# Altium PCB F4SDR2.PcbDoc (part 1 of 3)
Units mil, origin at the board's own origin, x right, y up, seen from the top; angles counter-clockwise.
Board outline 1676.41 x 2432 mil, 6 copper layers (Top Layer, GND1, PWR, PWR2/GND2, Signal Layer 1, Bottom Layer), stack 46.185 mil thick; 213 components, 239 nets, 1245 pads, 805 vias.
Unrouted connection lines stored in the file: 91.
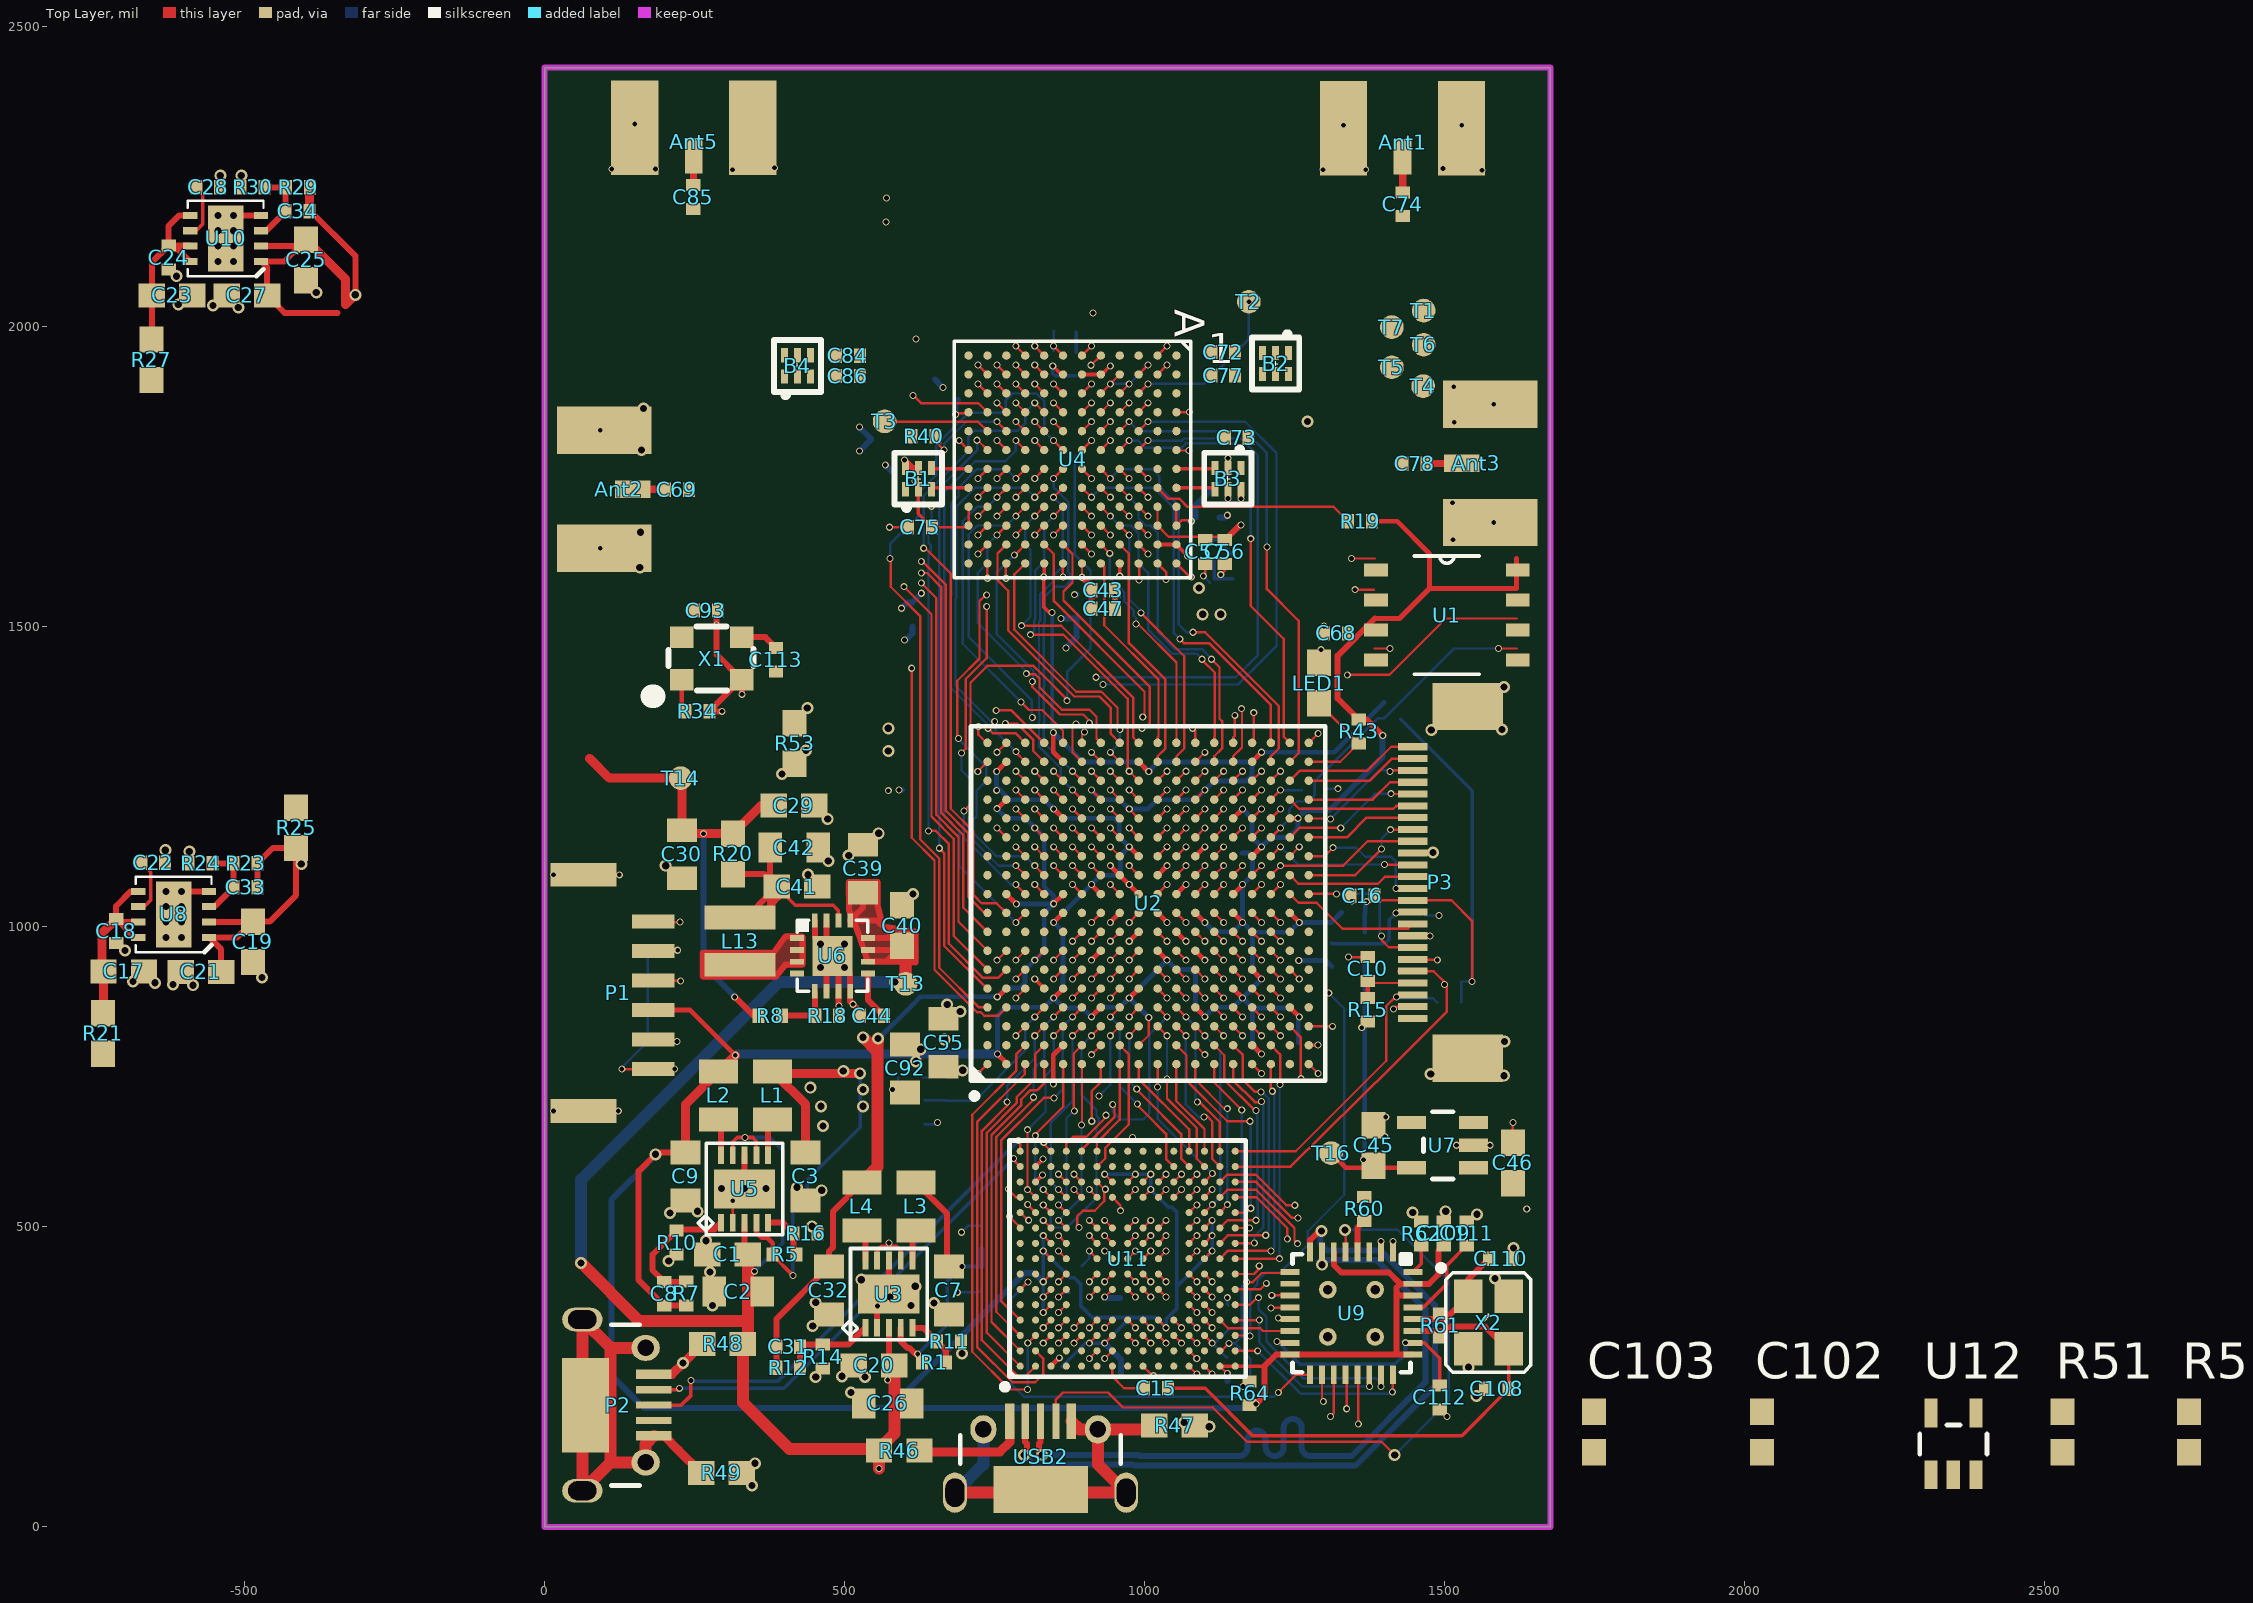
[diagram p0: Top Layer view]
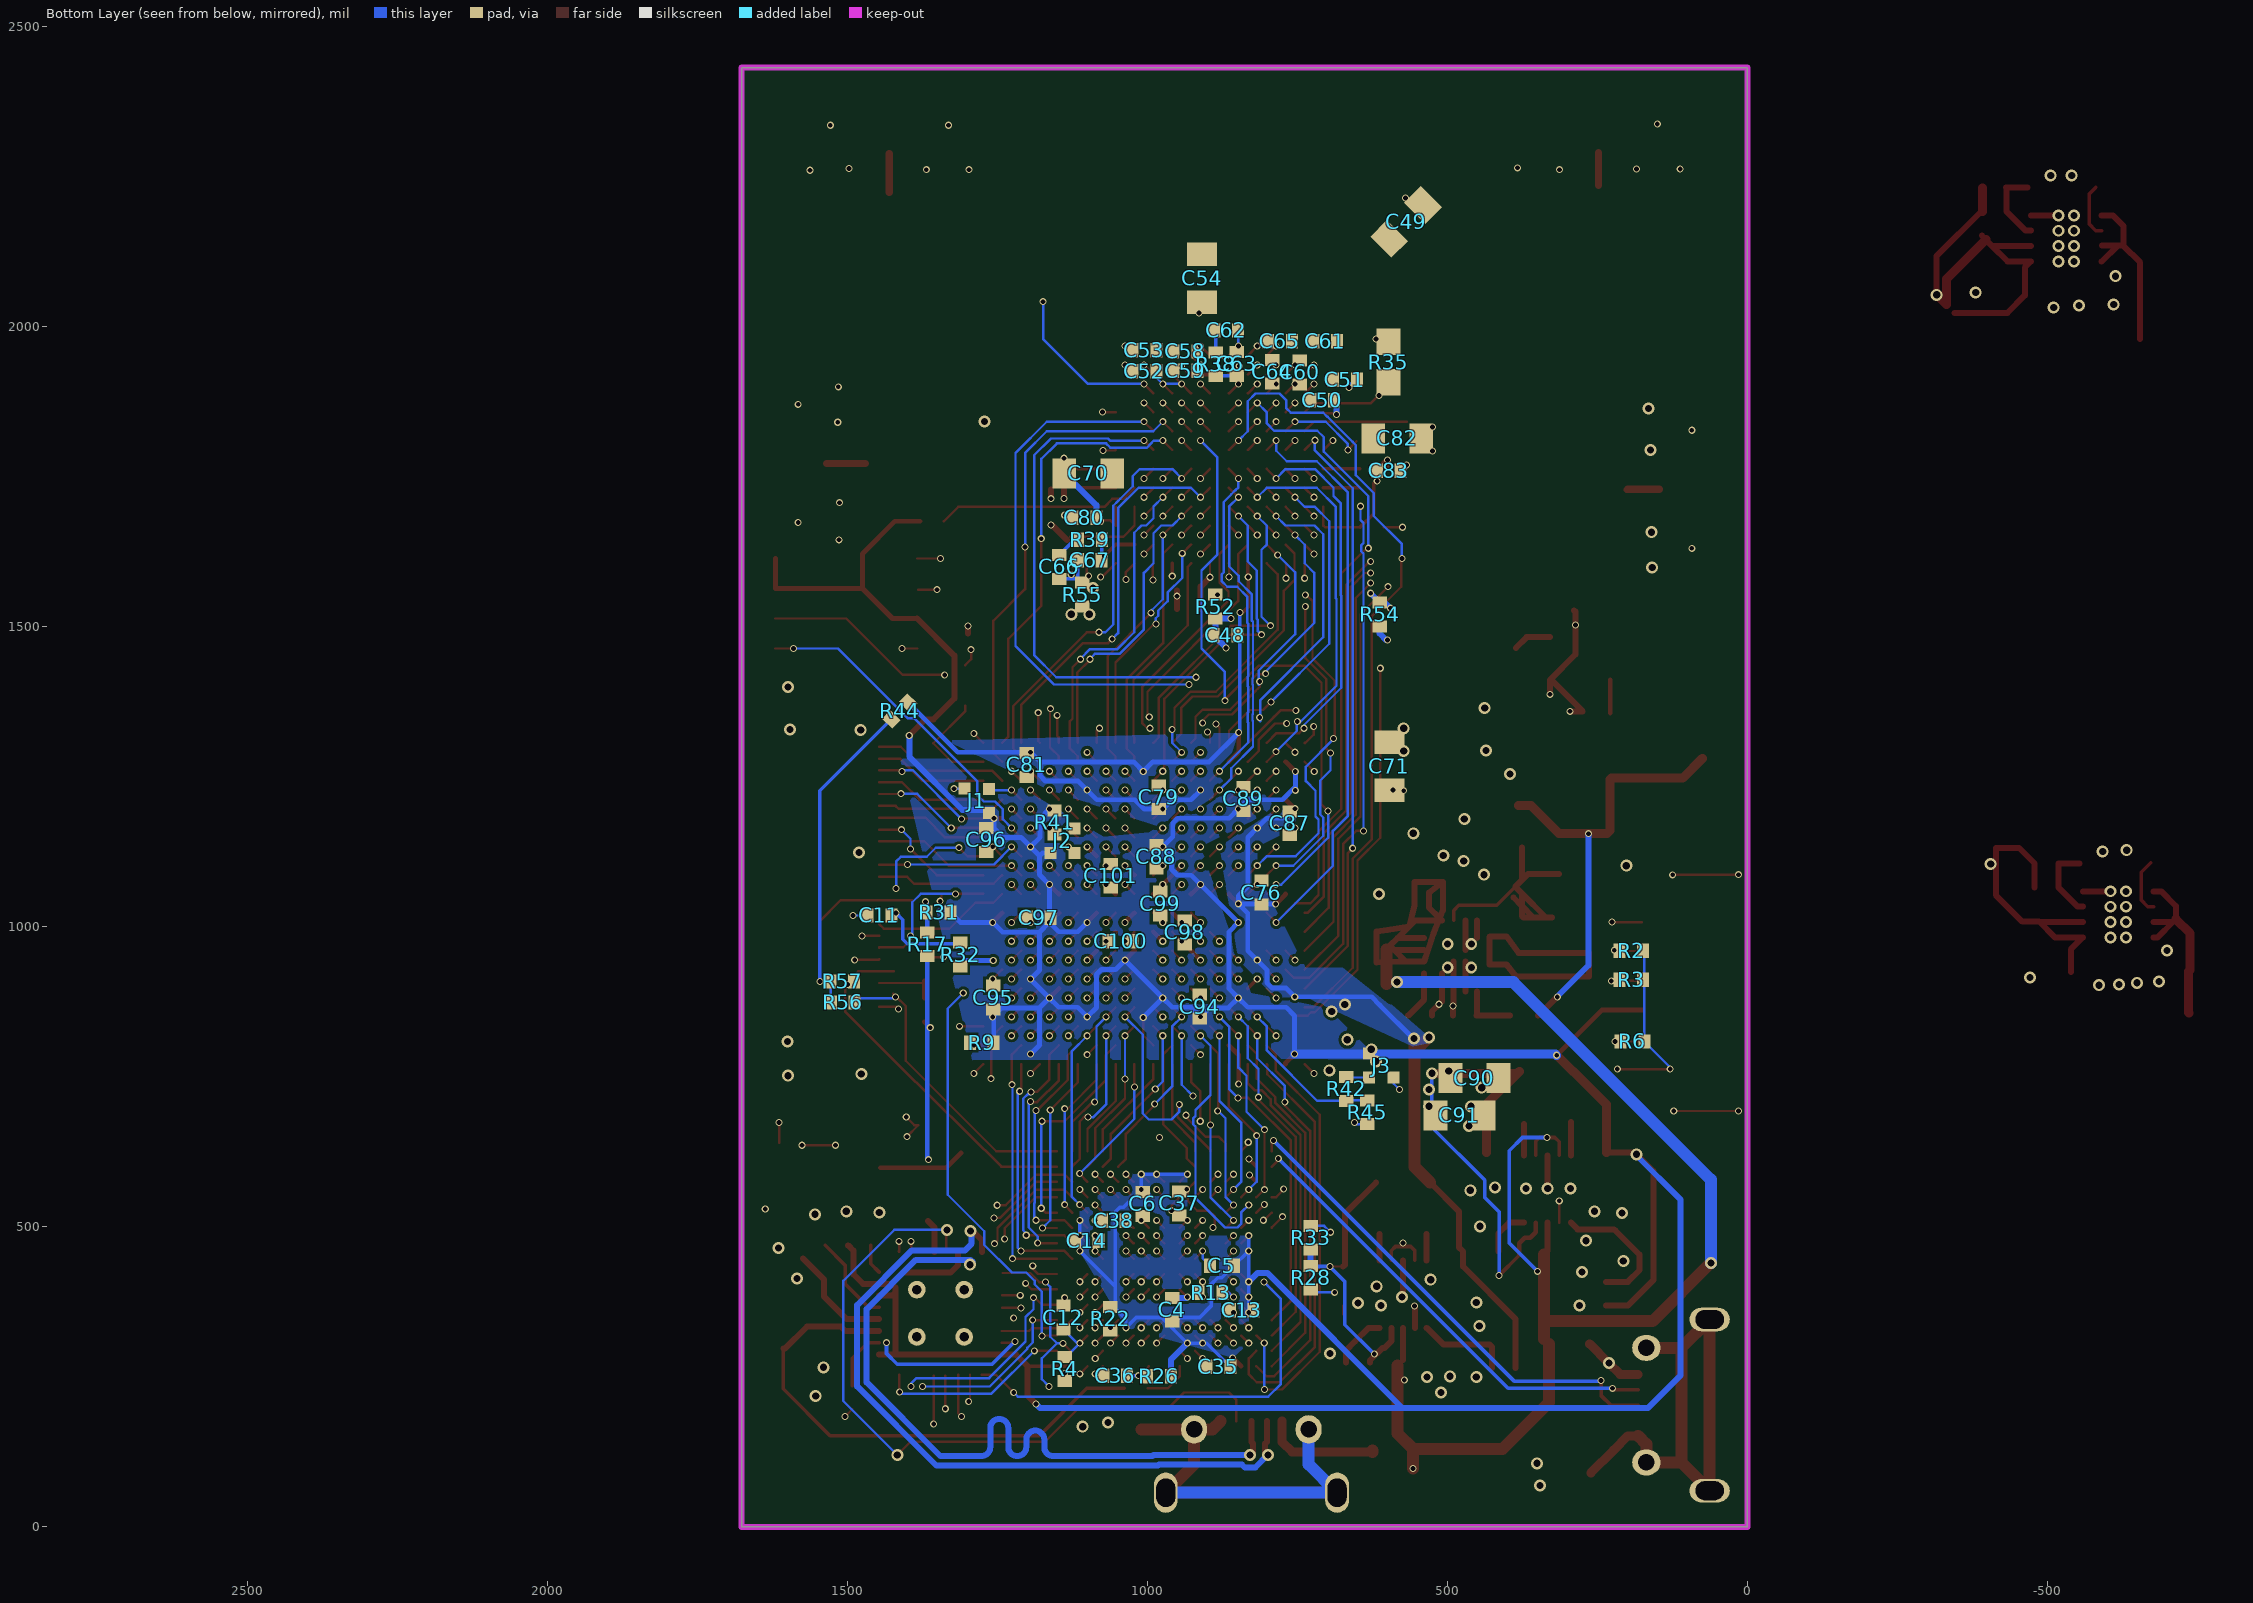
[diagram p1: Bottom Layer view, seen from below]
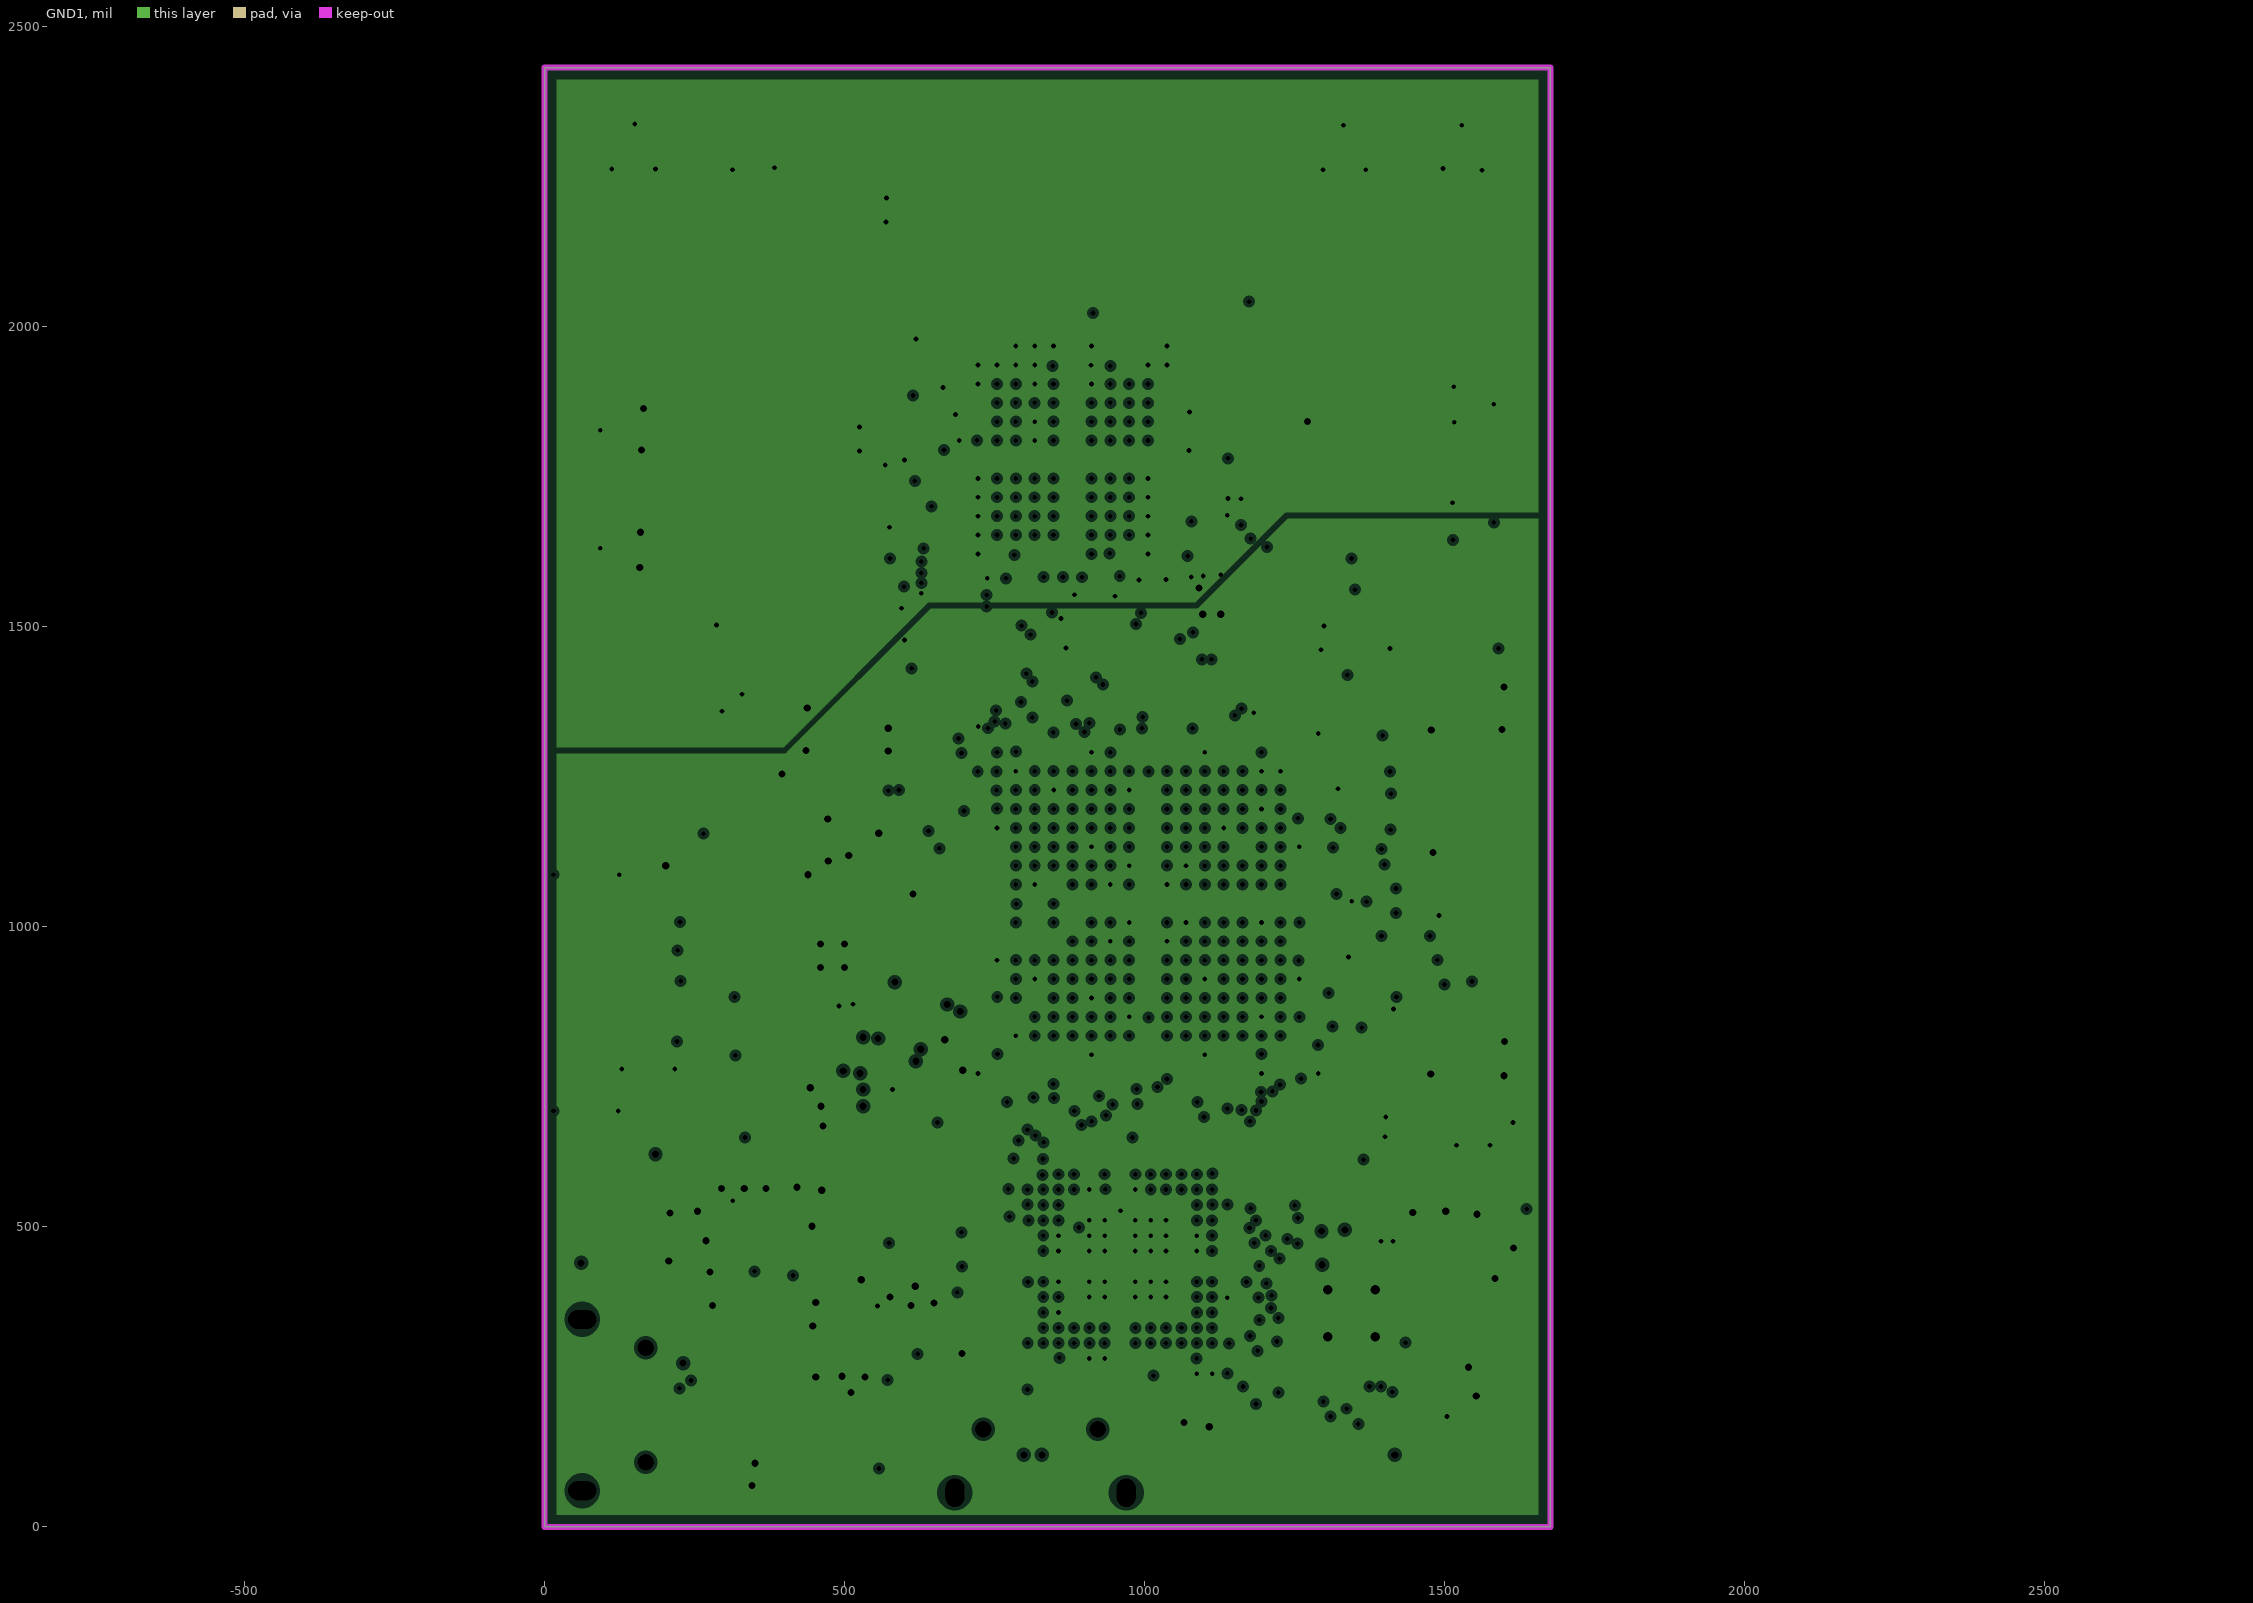
[diagram p2: GND1, clearances drawn from the general rule]
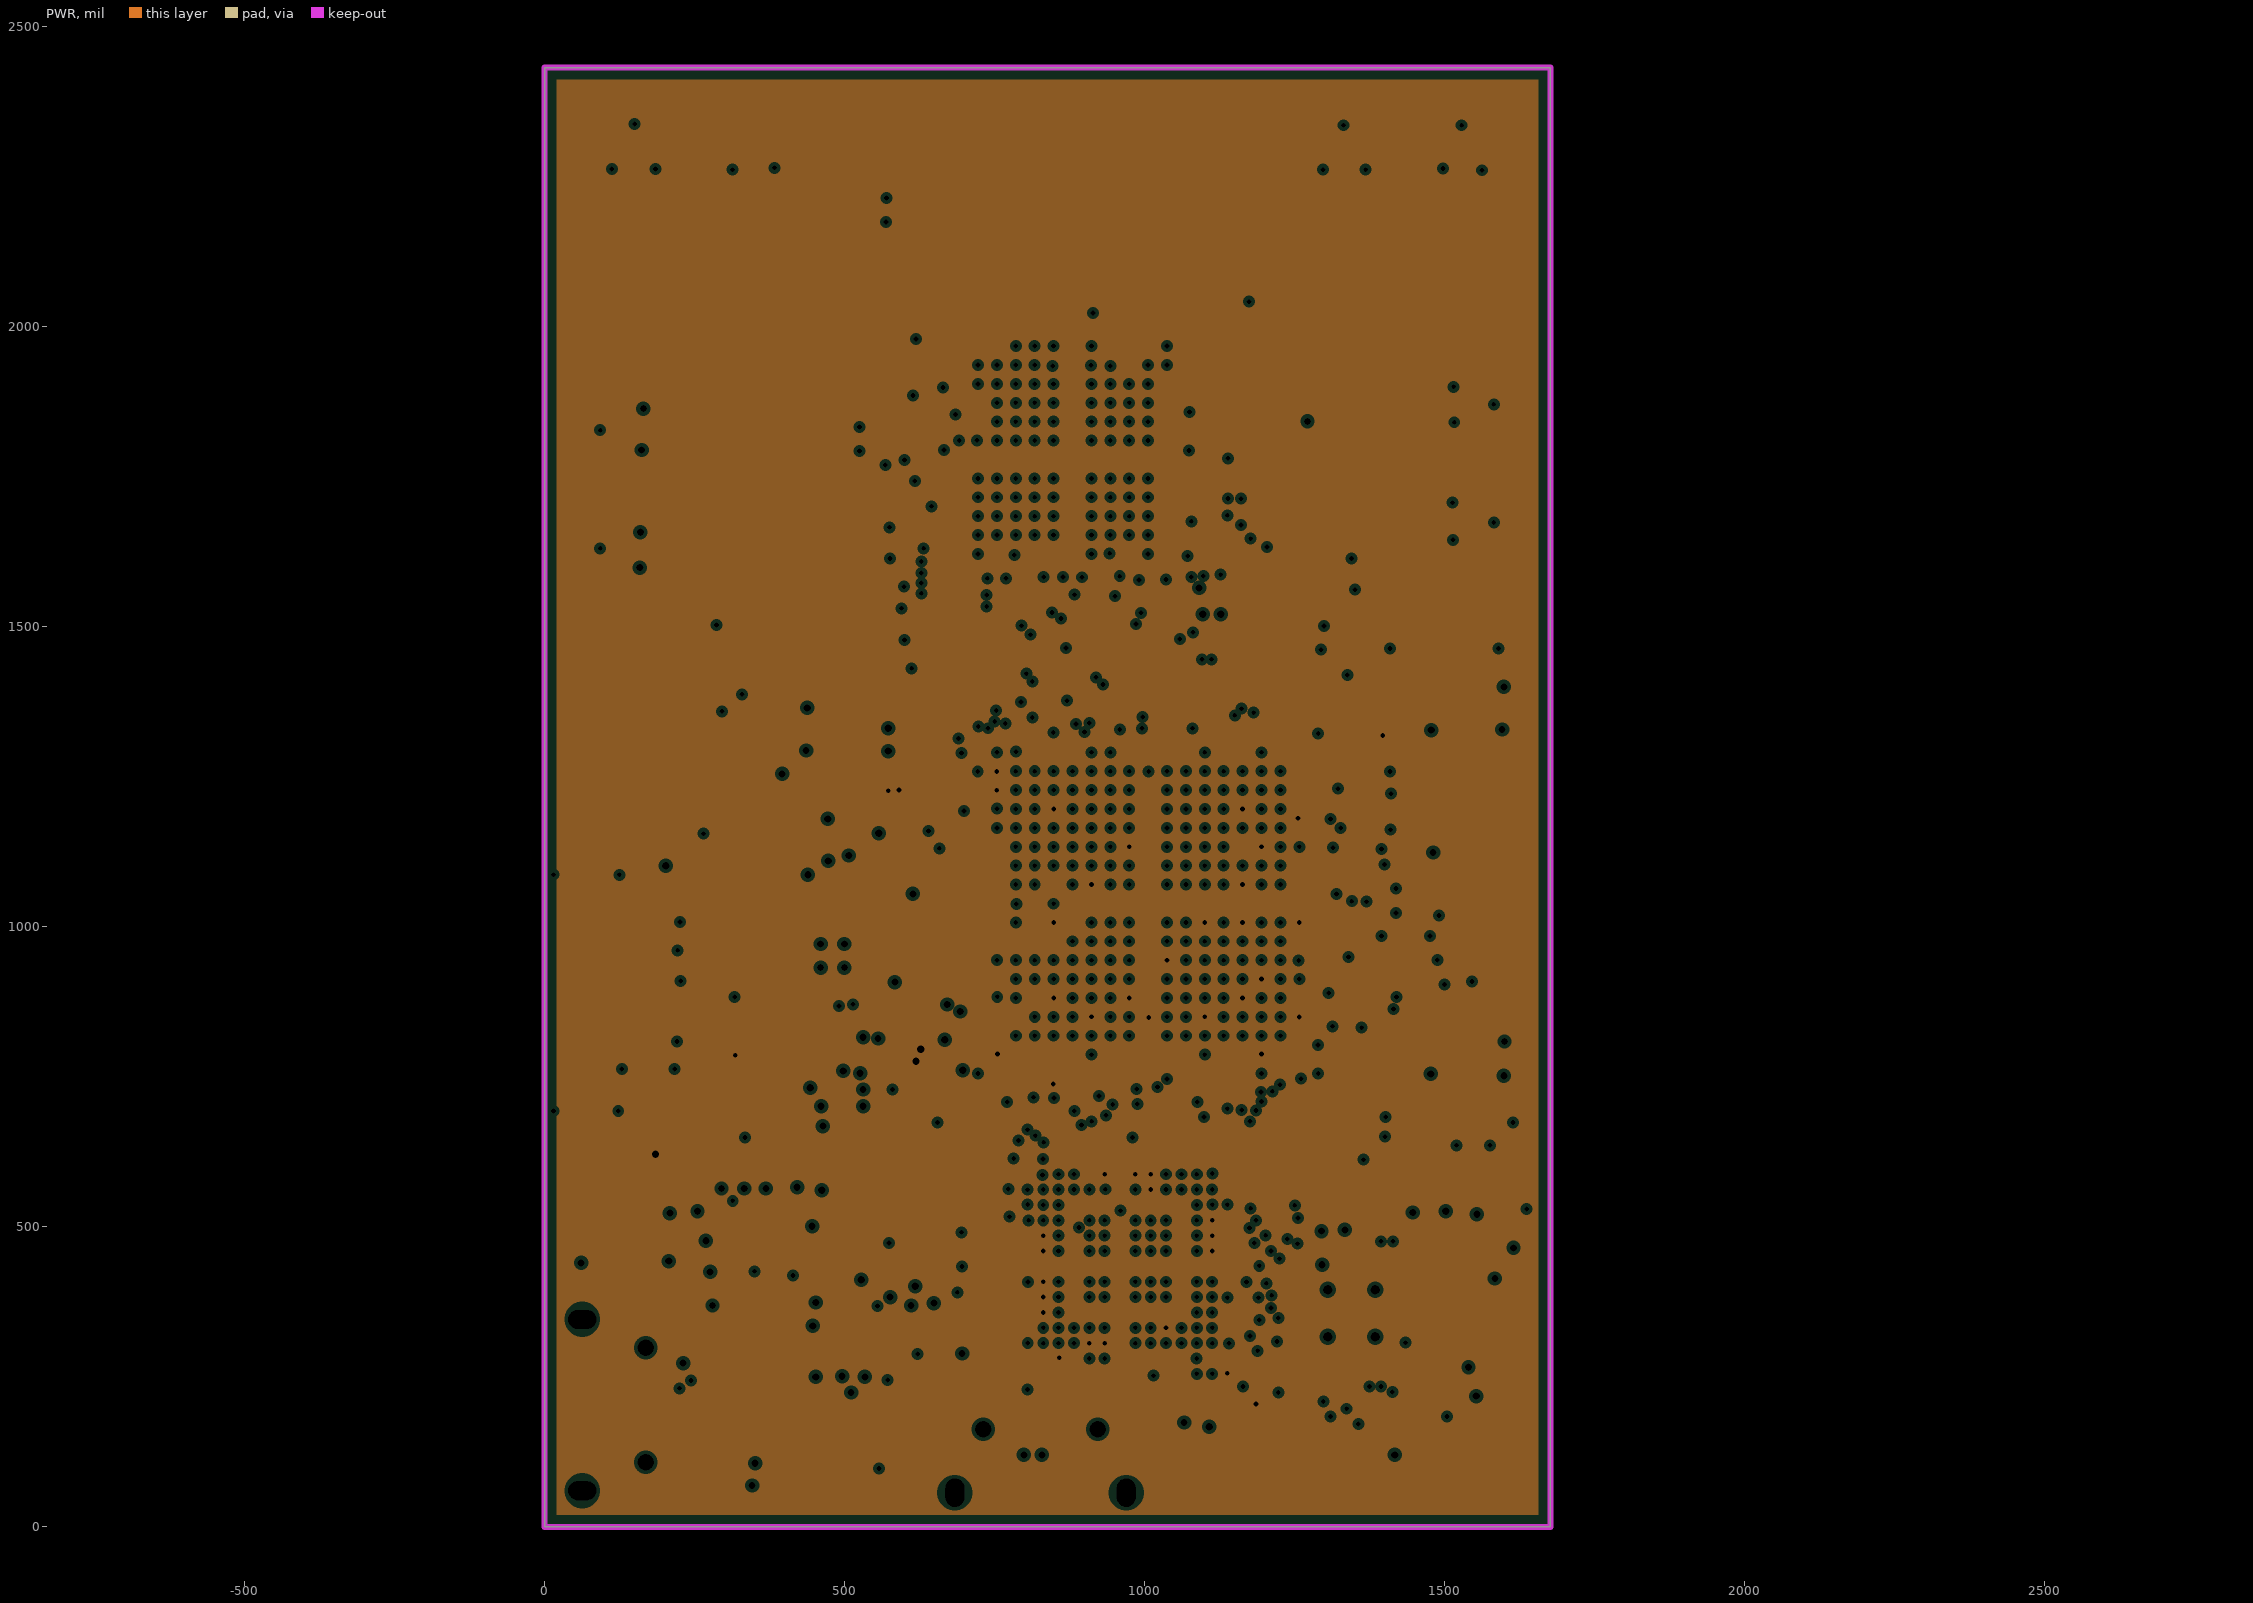
[diagram p3: PWR, clearances drawn from the general rule]
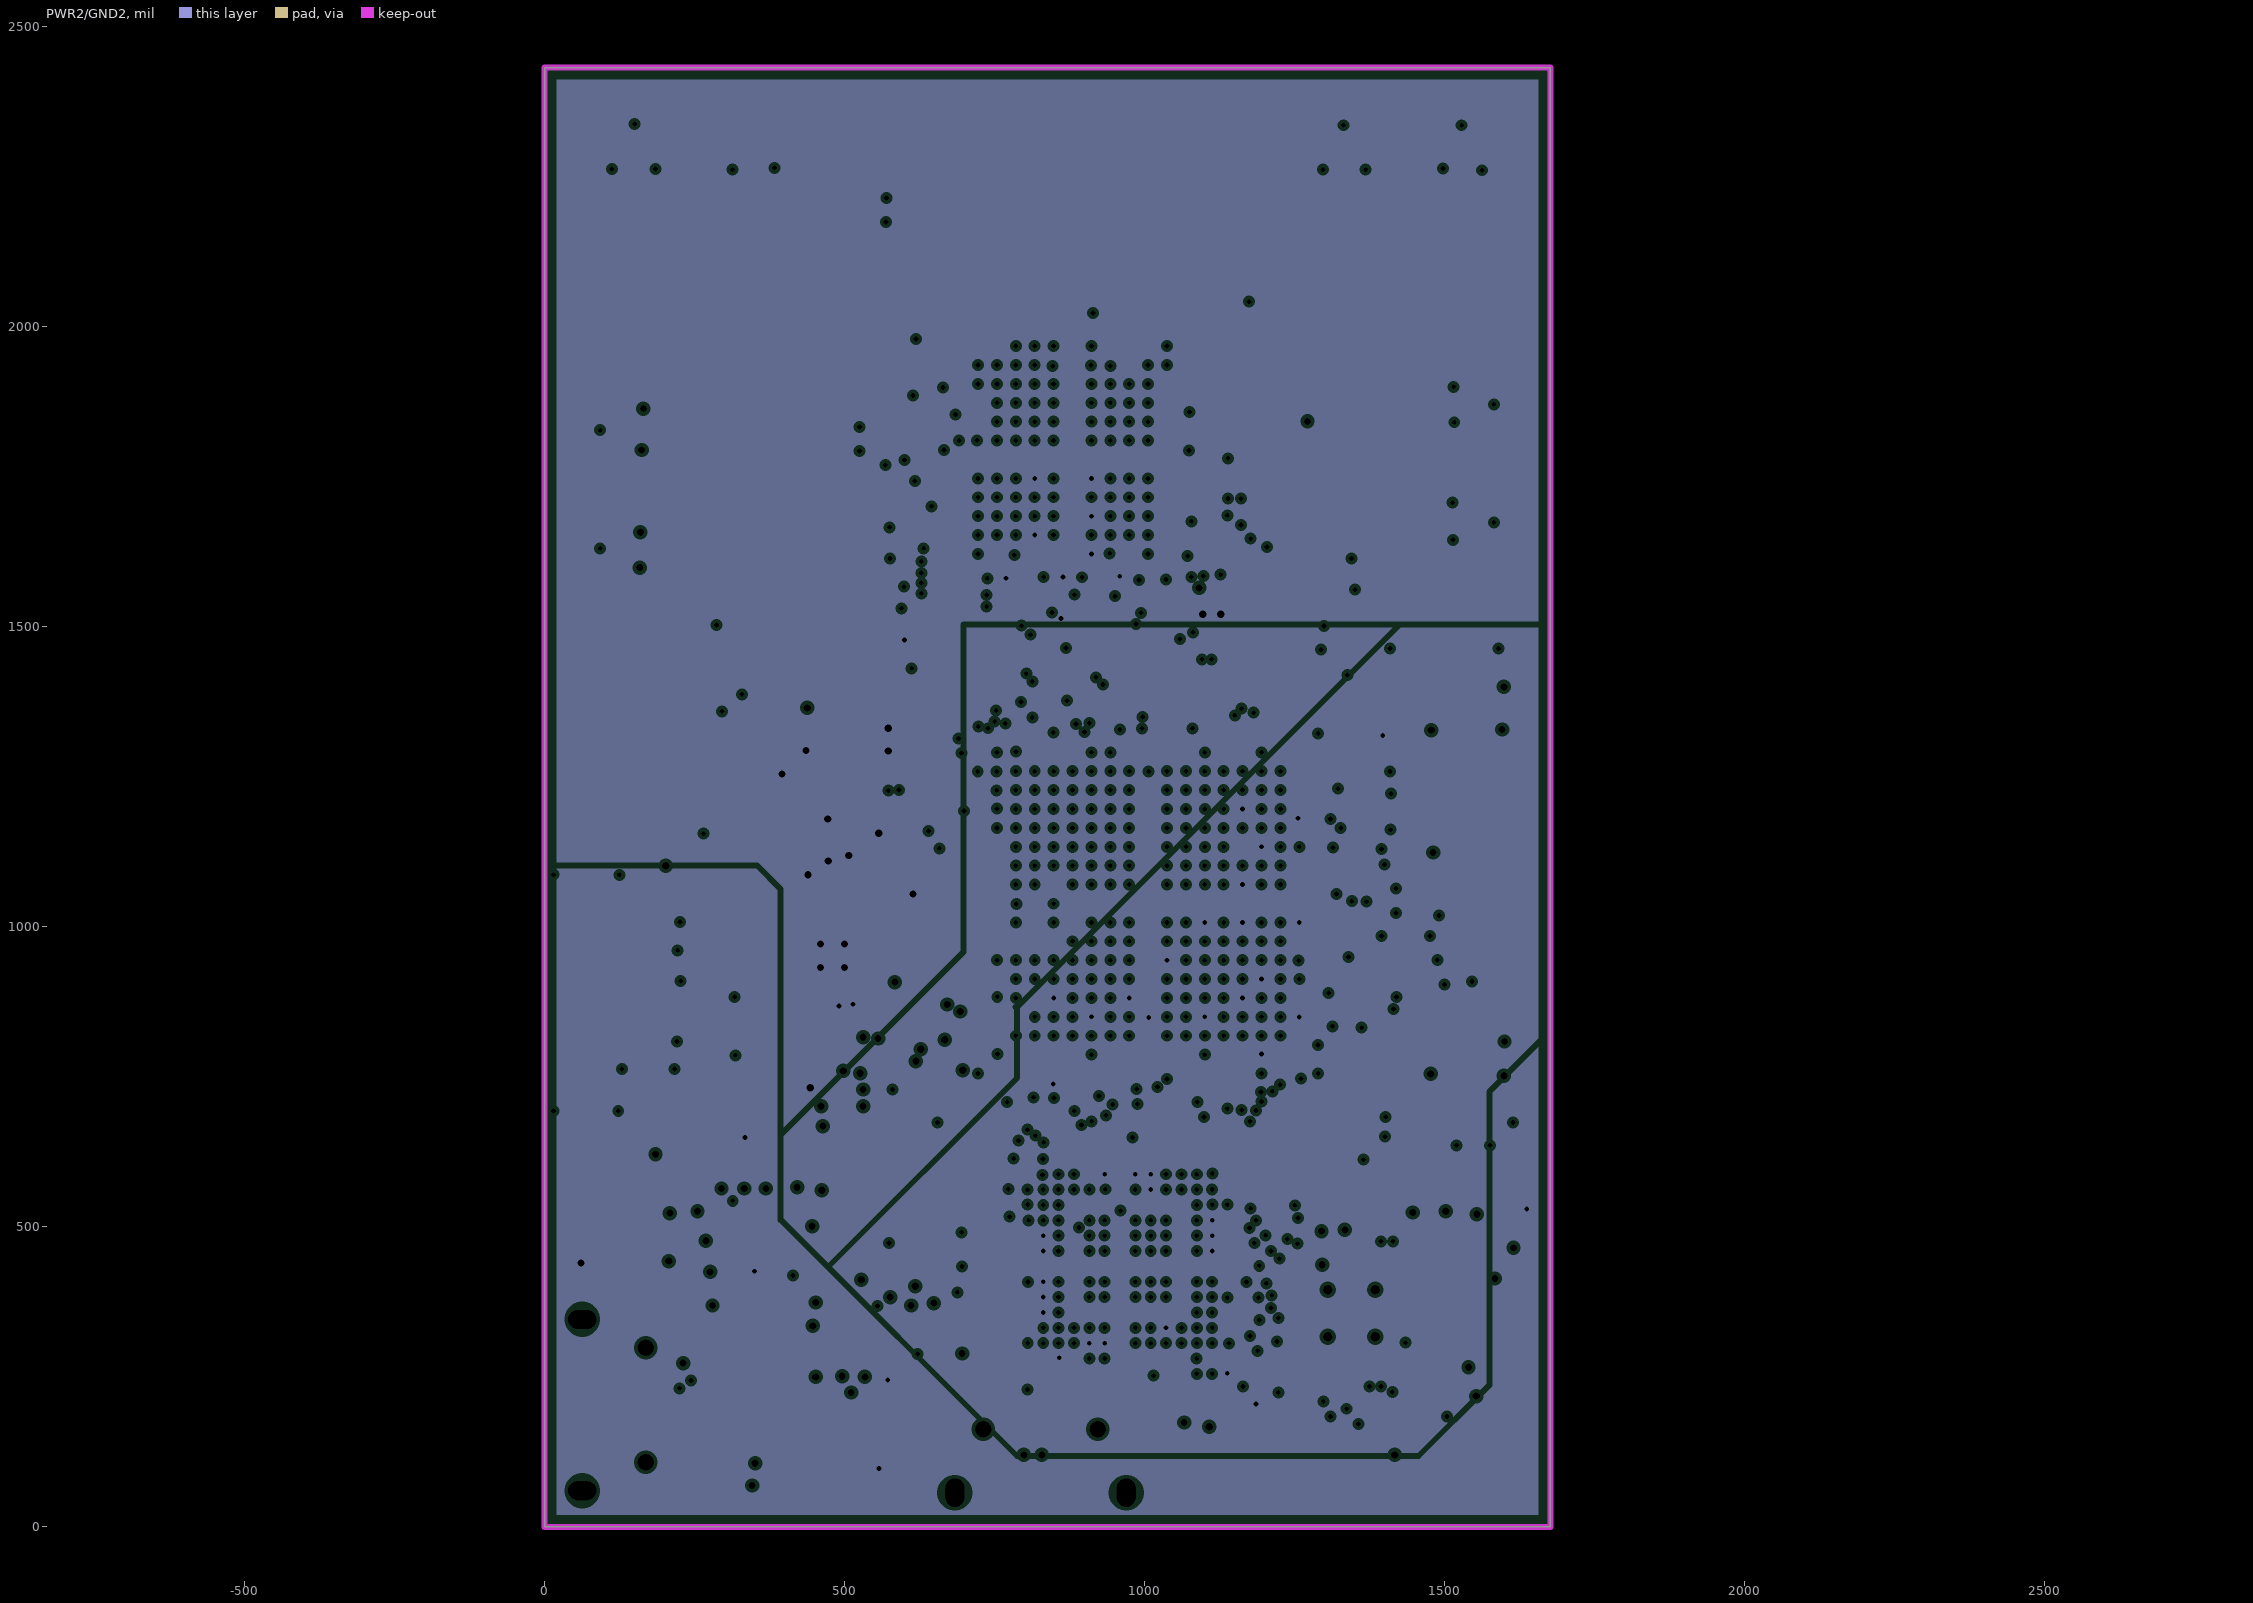
[diagram p4: PWR2/GND2, clearances drawn from the general rule]
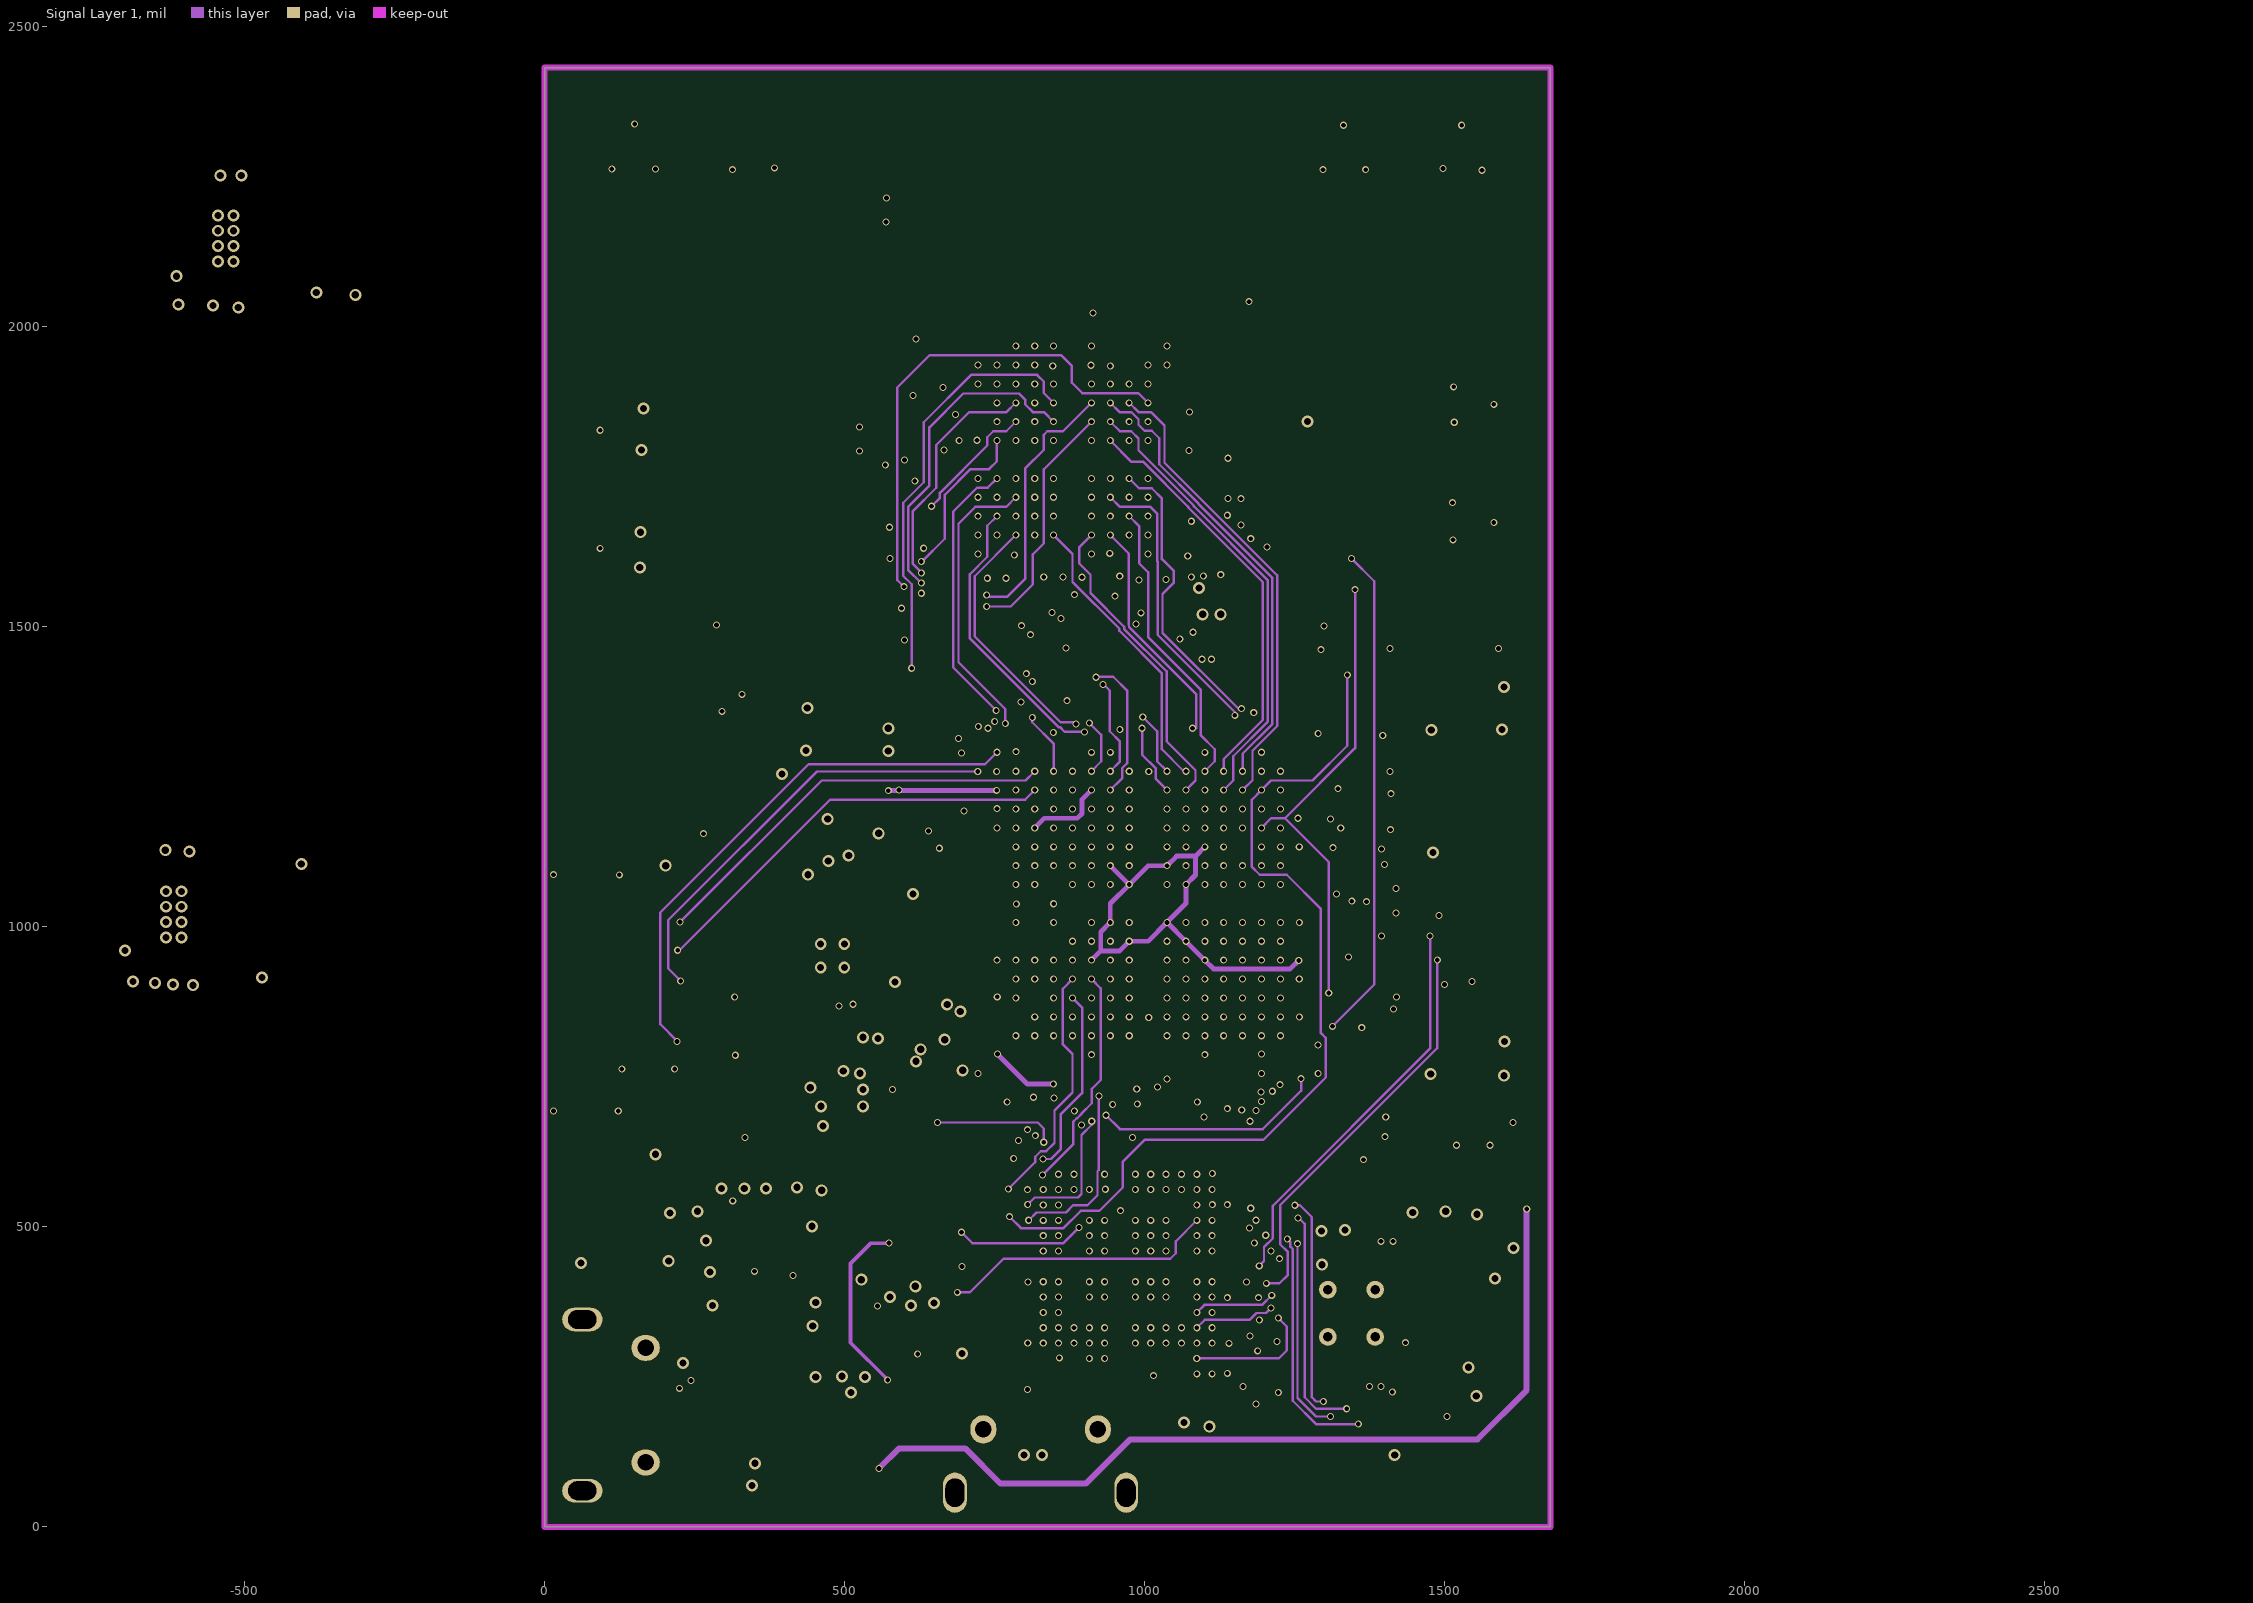
[diagram p5: Signal Layer 1]

## Layer stack, top to bottom
Top Solder: solder mask 0.4, Solder Resist, Dk 3.5
Top Layer: signal copper 1.4
Dielectric 1: core 7.7165, FR-4, Dk 4.2
GND1: plane copper 1.4169, net (Multiple Nets)
Dielectric 4: prepreg 5, Dk 4.2
PWR: plane copper 1.4173, net 3.3D
Dielectric 5: core 10, Dk 4.2
PWR2/GND2: plane copper 1.4173, net (Multiple Nets)
Dielectric 6: prepreg 5, Dk 4.2
Signal Layer 1: signal copper 1.4169
Dielectric 3: core 10, Dk 4.2
Bottom Layer: signal copper 1.4
Bottom Solder: solder mask 0.4, Solder Resist, Dk 3.5

## Board outline
0,0 1676.41,0 1676.41,2432 0,2432

## Design rules (kind name [scope] priority, off if disabled: settings)
Clearance PowerPour [InPolygon AND (InNet('1.8D') OR InNet('1.2') OR InNet('3.3D'))] p1: gap=5
Clearance "50R trace" [InNetClass('50R') vs InPolygon] p2: gap=20
Clearance [All] p3: gap=4
DiffPairsRouting USB_HS [InNet('USB_HS_P')     or InNet('USB_HS_N')] p1: maxlimit=10 minlimit=6 mostfreqgap=6 toplayer_minwidth=10 toplayer_maxwidth=15 toplayer_prefwidth=15 midlayer1_minwidth=12 midlayer1_maxwidth=15 midlayer1_prefwidth=15 bottomlayer_minwidth=10 bottomlayer_maxwidth=15 bottomlayer_prefwidth=15 maxuncoupledlength=500
DiffPairsRouting [All] p2: maxlimit=10 minlimit=4 mostfreqgap=4 toplayer_minwidth=4 toplayer_maxwidth=15 toplayer_prefwidth=4 midlayer1_minwidth=4 midlayer1_maxwidth=15 midlayer1_prefwidth=4 bottomlayer_minwidth=4 bottomlayer_maxwidth=15 bottomlayer_prefwidth=4 maxuncoupledlength=500
FanoutControl Fanout_Default [All] p5: bgadir=Out bgaviamode=Centered fanoutstyle=BGA fanoutdirection=Alternating viagrid=1 // Fanout_Default (Default Rule)
HoleToHoleClearance [All] p1: gap=7.87 allowstackedmicrovias=TRUE
MatchedLengths [InNet('USB_HS_P') or InNet('USB_HS_N')] p1: tolerance=50 checknetsindiffpair=TRUE checkdiffpairvsdiffpair=TRUE checkothers=TRUE
MinimumSolderMaskSliver [All] p1 off: minsoldermaskwidth=10
PlaneClearance [All] p1: clearance=6
PlaneConnect [All] p1: planeconnectstyle=Direct reliefexpansion=20 reliefentries=4 reliefconductorwidth=10 reliefairgap=10
PolygonConnect [All] p1: connectstyle=Direct reliefconductorwidth=10 reliefentries=4 polygonreliefangle="90 Angle" airgapwidth=10
RoomDefinition FPGA_IO_Transceiver [InComponentClass('FPGA_IO_Transceiver')] p1 off: confinementstyle=ConfineIn formatcopy=TRUE lockcomponents=FALSE outline -3048,-2845 -1048,-2845 -1048,-1845 -3048,-1845
RoomDefinition mcu2 [InComponentClass('mcu2')] p2 off: confinementstyle=ConfineIn formatcopy=TRUE lockcomponents=FALSE outline -3048,-2845 -1048,-2845 -1048,-1845 -3048,-1845
RoomDefinition FPGA_IO_MCU [InComponentClass('FPGA_IO_MCU')] p3 off: confinementstyle=ConfineIn formatcopy=TRUE lockcomponents=FALSE outline -3048,-2845 -1048,-2845 -1048,-1845 -3048,-1845
RoomDefinition USB_HS_PHY [InComponentClass('USB_HS_PHY')] p4 off: confinementstyle=ConfineIn formatcopy=TRUE lockcomponents=FALSE outline 1525,4292 4561,4292 4561,4740 1525,4740
RoomDefinition FPGA_Configuration_power [InComponentClass('FPGA_Configuration_power')] p5 off: confinementstyle=ConfineIn formatcopy=TRUE lockcomponents=FALSE outline 1525,2040 2435,2040 2435,2592 1525,2592
RoomDefinition camera [InComponentClass('camera')] p6 off: confinementstyle=ConfineIn formatcopy=TRUE lockcomponents=FALSE outline 1525,1207 3242,1207 3242,1991 1525,1991
RoomDefinition Balun&Matching [InComponentClass('Balun&Matching')] p7 off: confinementstyle=ConfineIn formatcopy=TRUE lockcomponents=FALSE outline 1525,593 1999,593 1999,1158 1525,1158
RoomDefinition AD936X [InComponentClass('AD936X')] p8 off: confinementstyle=ConfineIn formatcopy=TRUE lockcomponents=FALSE outline 1525,-371 2568,-371 2568,543 1525,543
RoomDefinition power [InComponentClass('power')] p9 off: confinementstyle=ConfineIn formatcopy=TRUE lockcomponents=FALSE outline 2856,295 4307,295 4307,993 2856,993
RoutingVias [All] p1: holewidth=7.87 width=11.81 viastyle="Through Hole" minholewidth=7.87 minwidth=11.81 maxholewidth=28 maxwidth=50
ShortCircuit ShortCircuit_NoNet [not InAnyNet vs not InAnyNet] p1: allowed=TRUE
ShortCircuit [not InNet('No Net') vs not InNet('No Net')] p2: allowed=FALSE
SilkToBoardRegionClearance [All] p1 off:
SilkToSilkClearance [All] p1 off: silktosilkclearance=10
SilkToSolderMaskClearance [IsPad] p1 off: minsilkscreentomaskgap=10 clearancetoexposedcopper=TRUE
SolderMaskExpansion [All] p1: expansion=2
UnpouredPolygon [All] p1: allowunpoured=FALSE
Width Width_1 [InNetClass('50R')] p1: maxlimit=29.61 minlimit=5.28 preferedwidth=25.2 toplayer_minwidth=9.14 toplayer_maxwidth=12.99 toplayer_prefwidth=10.92 midlayer1_maxwidth=7.78 midlayer1_prefwidth=6.44 bottomlayer_minwidth=21.41 impedancedriven=TRUE minimp=45.000000 maximp=55.000000 favimp=50.000000
Width [All] p2: maxlimit=60 minlimit=4 preferedwidth=4
19 further rules are at their usual default settings.

## Classes and differential pairs
net class tranciver_SE: AD936X_CS AD936X_MISO AD936X_MOSI AD936X_SCLK CLKOUT CTRL_IN0 CTRL_IN1 CTRL_IN2 CTRL_IN3 CTRL_OUT0 CTRL_OUT1 CTRL_OUT2 CTRL_OUT3 CTRL_OUT4 CTRL_OUT5 CTRL_OUT6 CTRL_OUT7 EN_AGC ENABLE GPO0 GPO1 GPO2 GPO3 TEST/ENABLE TXNRX
net class VDDA: RFGND VDD_DIG VDDA_RX_LO
net class 50R: NetAnt1_1 NetAnt2_1 NetAnt3_1 NetAnt5_1 NetB1_1 NetB2_1 NetB3_1 NetB4_1
component class FPGA_IO_MCU: C68 J1 J2 U1
net class USB_HS_D[9..0]: USB_HS_D0 USB_HS_D1 USB_HS_D2 USB_HS_D3 USB_HS_D4 USB_HS_D5 USB_HS_D6 USB_HS_D7 USB_HS_D8 USB_HS_D9
component class power: C1 C2 C3 C7 C8 C9 C17 C18 C19 C20 C21 C22 C23 C24 C25 C26 C27 C28 C29 C30 C31 C32 C33 C34 C39 C40 C41 C42 C44 C45 C46 C102 C103 L1 L2 L3 L4 L13 R1 R5 R7 R8 R10 R11 R12 R14 R16 R18 R20 R21 R23 R24 R25 R27 R29 R30 R50 R51 R53 T13 T14 T16 U3 U5 U6 U7 U8 U10 U12
component class AD936X: C43 C47 C48 C49 C50 C51 C52 C53 C54 C56 C57 C58 C59 C60 C61 C62 C63 C64 C65 C66 C67 C93 C113 R19 R34 R35 R38 R39 R40 R52 R54 R55 T4 T5 T6 T7 X1
component class Balun&Matching: Ant1 Ant2 Ant3 Ant5 B1 B2 B3 B4 C69 C70 C72 C73 C74 C75 C77 C78 C80 C82 C83 C84 C85 C86 T1 T2 T3 U4
component class camera: C10 C11 C16 P3 R15 R17 R31 R32 R44 R56 R57
component class FPGA_Configuration_power: C55 C71 C76 C79 C81 C87 C88 C89 C90 C91 C92 C94 C95 C96 C97 C98 C99 C100 C101 LED1 P1 R2 R3 R6 R9 R41 R43
component class mcu2: C4 C5 C6 C12 C13 C14 C15 C35 C36 C37 C38 P2 R4 R13 R22 R26 R28 R33 R48 R49 U11
component class USB_HS_PHY: C108 C109 C110 C111 C112 R46 R47 R60 R61 R62 R64 U9 USB2 X2
net class D[9..0]: D0 D1 D2 D3 D4 D5 D6 D7 D8 D9
net class DCMI_D[13..0]: DCMI_D2
net class FPGA_D[15..0]: FPGA_D0 FPGA_D1 FPGA_D2 FPGA_D3 FPGA_D4 FPGA_D5 FPGA_D6 FPGA_D7 FPGA_D8 FPGA_D9 FPGA_D10 FPGA_D11 FPGA_D12 FPGA_D13 FPGA_D14 FPGA_D15
net class FPGA_IO[15..0]: FPGA_IO0 FPGA_IO1 FPGA_IO2 FPGA_IO3 FPGA_IO4 FPGA_IO5 FPGA_IO6 FPGA_IO7 FPGA_IO8 FPGA_IO9 FPGA_IO10 FPGA_IO11 FPGA_IO12 FPGA_IO13 FPGA_IO14 FPGA_IO15
net class CTRL_IN[3..0]: CTRL_IN0 CTRL_IN1 CTRL_IN2 CTRL_IN3
net class CTRL_OUT[7..0]: CTRL_OUT0 CTRL_OUT1 CTRL_OUT2 CTRL_OUT3 CTRL_OUT4 CTRL_OUT5 CTRL_OUT6 CTRL_OUT7
net class GPO[3..0]: GPO0 GPO1 GPO2 GPO3
component class FPGA_IO_Transceiver: J3 R42 R45 U2
net class tranciver: AD936X_CS AD936X_MISO AD936X_MOSI AD936X_SCLK CLKOUT CTRL_IN0 CTRL_IN1 CTRL_IN2 CTRL_IN3 CTRL_OUT0 CTRL_OUT1 CTRL_OUT2 CTRL_OUT3 CTRL_OUT4 CTRL_OUT5 CTRL_OUT6 CTRL_OUT7 DATA_CLK_N DATA_CLK_P EN_AGC ENABLE FB_CLK_N FB_CLK_P GPO0 GPO1 GPO2 GPO3 RX_D0_N RX_D0_P RX_D1_N RX_D1_P RX_D2_N RX_D2_P RX_D3_N RX_D3_P RX_D4_N RX_D4_P RX_D5_N RX_D5_P RX_FRAME_N RX_FRAME_P TEST/ENABLE TX_D0_N TX_D0_P TX_D1_N TX_D1_P TX_D2_N TX_D2_P TX_D3_N TX_D3_P TX_D4_N TX_D4_P TX_D5_N TX_D5_P TX_FRAME_N TX_FRAME_P TXNRX
net class VDD: 1.2 1.8D 2.8 3.3D 5V V1.32 VCAP1 VCAP2
differential pair DATA_CLK: +DATA_CLK_P -DATA_CLK_N
differential pair FB_CLK: +FB_CLK_P -FB_CLK_N
differential pair RX_D0: +RX_D0_P -RX_D0_N
differential pair RX_D1: +RX_D1_P -RX_D1_N
differential pair RX_D2: +RX_D2_P -RX_D2_N
differential pair RX_D3: +RX_D3_P -RX_D3_N
differential pair RX_D4: +RX_D4_P -RX_D4_N
differential pair RX_D5: +RX_D5_P -RX_D5_N
differential pair RX_FRAME: +RX_FRAME_P -RX_FRAME_N
differential pair TX_D0: +TX_D0_P -TX_D0_N
differential pair TX_D1: +TX_D1_P -TX_D1_N
differential pair TX_D2: +TX_D2_P -TX_D2_N
differential pair TX_D3: +TX_D3_P -TX_D3_N
differential pair TX_D4: +TX_D4_P -TX_D4_N
differential pair TX_D5: +TX_D5_P -TX_D5_N
differential pair TX_FRAME: +TX_FRAME_P -TX_FRAME_N
differential pair USB_HS: +USB_HS_P -USB_HS_N

## Components (designator, comment, footprint, x,y, rotation, side; value= is the part's Value field where it differs from the comment)
Ant1 "Antenna" SMA-2 1528.52,2331.13 r180 top
Ant2 "Antenna" SMA-2 99.81,1827.8 r270 top
Ant3 "Antenna" SMA-2 1576.19,1674.11 r90 top
Ant5 "Antenna" SMA-2 347.17,2332.13 r180 top
B1 "Balun" HHM1711D1/HHM1732B1 623,1747 r90 top
B2 "Balun" HHM1711D1/HHM1732B1 1218.5,1938.98 r270 top
B3 "Balun" HHM1711D1/HHM1732B1 1139,1747 r270 top
B4 "Balun" HHM1711D1/HHM1732B1 421.56,1935.1 r90 top
C1 "1uF" 0603 305,454 r0 top
C2 "10UF" 0805 323,392 r0 top
C3 "10uF" 0805 435,584 r90 top
C4 "0.1uF * 6" 0402 959,362 r270 bottom
C5 "0.1uF" 0402 876,435 r180 bottom
C6 "0.1uF" 0402 1008,538 r90 bottom
C7 "10uF" 0805 674,394 r90 top
C8 "33pF" 0402 199.29,388.55 r90 top
C9 "10uF" 0805 235,584 r90 top
C10 "1uF" 0402 1372,930 r270 top
C11 "0.1uF" 0402 1447,1019 r180 bottom
C12 "0.1uF" 0402 1140,349 r270 bottom
C13 "0.1uF" 0402 843,361 r180 bottom
C14 "0.1uF" 0402 1101,477 r0 bottom
C15 "0.1uF" 0402 1019,231 r0 top
C16 "0.1uF" 0402 1363,1052 r0 top
C17 "2.2uF" 0603 -701.02,925.87 r180 top
C18 "0.1uF" 0402 -714.02,992.87 r90 top
C19 "2.2uF" 0603 -486.02,974.87 r90 top
C20 "1uF" 0603 549,269 r0 top
C21 "0.1uF" 0603 -573.02,924.87 r0 top
C22 "0.1uF" 0402 -652.02,1106.87 r180 top
C23 "2.2uF" 0603 -620.35,2052.46 r180 top
C24 "0.1uF" 0402 -626.35,2115.46 r90 top
C25 "2.2uF" 0603 -397.35,2111.46 r90 top
C26 "10UF" 0805 572,206 r0 top
C27 "0.1uF" 0603 -496.35,2052.46 r0 top
C28 "0.1uF" 0402 -560.35,2232.46 r180 top
C29 "Cap" 0603 416,1202 r180 top
C30 "Cap" 0805 229,1121 r90 top
C31 "33pF" 0402 406,300 r0 top
C32 "10uF" 0805 474,394 r90 top
C33 "3.3nF" 0402 -498.02,1065.87 r180 top
C34 "3.3nF" 0402 -411.35,2192.46 r180 top
C35 "0.1uF * 6" 0402 882,267 r180 bottom
C36 "0.1uF" 0402 1054,252 r180 bottom
C37 "0.1uF" 0402 947,539 r90 bottom
C38 "0.1uF" 0402 1056,510 r0 bottom
C39 "Cap" 0805 531,1097 r90 top
C40 "Cap" 0603 596,1002 r90 top
C41 "Cap" 0603 421,1067 r180 top
C42 "Cap" 0805 416,1132 r180 top
C43 "1uF" 0402 931,1561 r0 top
C44 "3.3nF" 0402 546,852 r180 top
C45 "4.7uF" 0603 1382,636 r270 top
C46 "4.7uF" 0603 1614,607 r270 top
C47 "10nF" 0402 931,1530 r0 top
C48 "1uF" 0402 870,1486 r0 bottom
C49 "10uF" 0805 569,2175 r135 bottom
C50 "1uF" 0402 709,1878 r180 bottom
C51 "10nF" 0402 671,1912 r180 bottom
C52 "1uF" 0402 1005,1926 r0 bottom
C53 "10nF" 0402 1005,1961 r0 bottom
C54 "10uF" 0805 909,2081 r270 bottom
C55 "10uF" 0805 665,807 r270 top
C56 "1uF" 0402 1134,1625 r270 top
C57 "10nF" 0402 1101,1625 r270 top
C58 "1uF" 0402 937,1959 r180 bottom
C59 "10nF" 0402 937,1927 r180 bottom
C60 "1uF" 0402 746,1924 r90 bottom
C61 "10nF" 0402 704,1976 r180 bottom
C62 "1uF" 0402 869,1994 r180 bottom
C63 "1nF" 0402 851,1938 r90 bottom
C64 "1uF" 0402 792,1925 r90 bottom
C65 "10nF" 0402 779,1976 r0 bottom
C66 "1uF" 0402 1147,1600 r270 bottom
C67 "1nF" 0402 1096,1611 r0 bottom
C68 "0.1uF" 0402 1319,1489 r0 top
C69 "22pF" 0402 220.81,1728.8 r180 top
C70 "10uF" 0805 1098.43,1755.91 r0 bottom
C71 "10uF" 0805 597,1268 r90 bottom
C72 "22pF" 0402 1131.5,1957.98 r180 top
C73 "1000pF" 0402 1153.54,1814.96 r0 top
C74 "22pF" 0402 1430.52,2204.13 r90 top
C75 "1000pF" 0402 626,1666 r180 top
C76 "0.1uF" 0402 810,1057 r90 bottom
C77 "22pF" 0402 1131.5,1918.98 r180 top
C78 "22pF" 0402 1450.19,1772.11 r180 top
C79 "0.1uF" 0402 981,1216 r90 bottom
C80 "1000pF" 0402 1105,1682 r0 bottom
C81 "0.1uF" 0402 1201,1270 r270 bottom
C82 "10uF" 0805 584,1814 r0 bottom
C83 "1000pF" 0402 598,1760 r180 bottom
C84 "22pF" 0402 505.56,1952.1 r0 top
C85 "22pF" 0402 248.17,2216.13 r90 top
C86 "22pF" 0402 505.56,1918.1 r0 top
C87 "0.1uF" 0402 763,1173 r270 bottom
C88 "0.1uF" 0402 985,1117 r270 bottom
C89 "0.1uF" 0402 840,1213 r90 bottom
C90 "10uF" 0805 455,748 r180 bottom
C91 "10uF" 0805 480,686 r180 bottom
C92 "10uF" 0805 601,764 r270 top
C93 "0.1uF" 0402 268.82,1527.31 r0 top
C94 "0.1uF" 0402 913,867 r90 bottom
C95 "0.1uF" 0402 1257,882 r90 bottom
C96 "0.1uF" 0402 1269,1145 r270 bottom
C97 "0.1uF" 0402 1181,1015 r0 bottom
C98 "0.1uF" 0402 938,991 r270 bottom
C99 "0.1uF" 0402 979,1039 r270 bottom
C100 "0.1uF" 0402 1045,976 r180 bottom
C101 "0.1uF" 0402 1061,1085 r90 bottom
C102 "4.7uF" 0603 2029,158 r90 top
C103 "4.7uF" 0603 1749,158 r90 top
C108 "10pF" 0402 1587,230 r0 top
C109 "1uF" 0402 1499,489 r90 top
C110 "10pF" 0402 1594,447 r180 top
C111 "1uF" 0402 1537,489 r90 top
C112 "1uF" 0402 1492,216 r270 top
C113 "0R/0.1uF" 0402 385.82,1445.31 r270 top
J1 "jumper" 0402J 1264,1230 r270 bottom
J2 "jumper" 0402J 1122,1123 r0 bottom
J3 "jumper" 0402J 631,749 r90 bottom
L1 "2.2UH" 0806 380,719 r90 top
L2 "2.2uH" 0806 290,719 r90 top
L3 "2.2UH" 0806 619,534 r90 top
L4 "2.2uH" 0806 529,534 r90 top
L13 "2.2uH" L3015 326,937 r90 top
LED1 "LED0" 0603 1291,1406 r90 top
P1 "JTAG-6P" GH1.25-6 124,886 r270 top
P2 "SWD_MicroUSB" MICRO-YZX -48,203 r270 top
P3 "Camera24P" FPC-0.5mm-24 1493,1074 r270 top
R1 "220k" 0402 649,274 r0 top
R2 "10k" 0402 194,960 r180 bottom
R3 "10k" 0402 194,912 r180 bottom
R4 "10k" 0402 1138,263 r90 bottom
R5 "180k" 0402 400,454 r0 top
R6 "10k" 0402 192,809 r180 bottom
R7 "300k" 0402 236,389 r90 top
R8 "17.5k" 0402 376,852 r0 top
R9 "10k" 0402 1276,807 r0 bottom
R10 "68k" 0402 220,474 r270 top
R11 "180k" 0402 674,309 r0 top
R12 "360k" 0402 406,265 r0 top
R13 "10k" 0402 895,390 r180 bottom
R14 "180k" 0402 464,284 r270 top
R15 "0R" 0402 1372,862 r270 top
R16 "180k" 0402 435,489 r0 top
R17 "0R" 0402 1367,971 r90 bottom
R18 "10k 1%" 0402 471,852 r0 top
R19 "0R" 0402 1359,1676 r0 top
R20 "FB" 0603 314,1122 r270 top
R21 "FB" 0603 -736.02,822.87 r270 top
R22 "0R" 0402 1062,347 r270 bottom
R23 "6.25k" 0402 -498.02,1105.87 r180 top
R24 "10k" 0402 -573.02,1105.87 r180 top
R25 "NC/0R" 0603 -414.02,1164.87 r90 top
R26 "10k" 0402 981,251 r180 bottom
R27 "FB" 0603 -655.35,1945.46 r270 top
R28 "0R" 0402 728,415 r90 bottom
R29 "6.25k" 0402 -410.43,2232.43 r180 top
R30 "10k" 0402 -486.35,2232.46 r180 top
R31 "NC/0R" 0402 1348,1024 r0 bottom
R32 "NC/0R" 0402 1312,954 r270 bottom
R33 "0R" 0402 728,482 r270 bottom
R34 "0R" 0402 254.82,1359.31 r0 top
R35 "14.3k 1%" 0603 598.43,1940.94 r90 bottom
R38 "1R" 0402 886,1938 r270 bottom
R39 "1R" 0402 1096,1645 r180 bottom
R40 "10k" 0402 632,1818 r180 top
R41 "NC" 0402 1155,1174 r90 bottom
R42 "10k" 0402 669,730 r270 bottom
R43 "10k" 0402 1357,1326 r270 top
R44 "NC/0R" 0402 1413,1360 r315 bottom
R45 "1k" 0402 634,691 r90 bottom
R46 "FB" 0603 591,127 r0 top
R47 "FB" 0603 1050,169 r0 top
R48 "FB" 0603 297,305 r180 top
R49 "FB" 0603 295,90 r180 top
R50 "FB" 0603 2741,158 r90 top
R51 "FB" 0603 2530,158 r90 top
R52 "FB" 0402 887,1534 r270 bottom
R53 "FB" 0603 417,1306 r270 top
R54 "FB" 0402 613,1521 r270 bottom
R55 "FB" 0402 1109,1554 r270 bottom
R56 "4.7k" 0402 1508,874 r180 bottom
R57 "4.7k" 0402 1509,909 r180 bottom
R60 "10k" 0402 1366,530 r270 top
R61 "1MR" 0402 1493,336 r270 top
R62 "12k 1%" 0402 1461,489 r270 top
R64 "10k" 0402 1175,223 r270 top
T1 "TestPad" "TestPad - 1mm" 1465.28,2027.25 r0 top
T2 "TestPad" "TestPad - 1mm" 1174,2042 r0 top
T3 "TestPad" "TestPad - 1mm" 566.93,1842.52 r0 top
T4 "TestPad" "TestPad - 1mm" 1464.28,1901.25 r0 top
T5 "TestPad" "TestPad - 1mm" 1412.22,1932.75 r0 top
T6 "TestPad" "TestPad - 1mm" 1465.28,1970.25 r0 top
T7 "TestPad" "TestPad - 1mm" 1412.22,1999.75 r0 top
T13 "TestPad" "TestPad - 1mm" 602,905 r180 top
T14 "TestPad" "TestPad - 1mm" 227,1248 r0 top
T16 "TestPad" "TestPad - 1mm" 1311,623 r90 top
U1 "M25P16" SO8 1503.94,1519.69 r0 top
U2 "XC6SLX45-3CSG324I" CSG324 1006,1039 r90 top
U3 "Tps62410" DFN-10P-3X3 574,389 r90 top
U4 "AD9363ABCZ" AD936X 880,1779 r270 top
U5 "Tps62410" DFN-10P-3X3 333.35,564.16 r90 top
U6 "TPS62130" TPS62130 479.98,951.76 r0 top
U7 "RT9013-28GB" SOT23-5 1497,636 r90 top
U8 "TPS7A8101" TPS7A8101 -618.02,1020.87 r180 top
U9 "USB3300_1" USB3300 1345,356 r270 top
U10 "TPS7A8101" TPS7A8101 -531.35,2147.46 r180 top
U11 "STM32F427IGH6" STM-UFBGA176+25_M 972,447 r90 top
U12 "RT9013-33GB" SOT23-5 2348,138 r0 top
USB2 "USB Micro Type B" MICRO-YZX 826.77,-54 r0 top
X1 "OSC_40M" TXC_7Q 278.82,1447.31 r0 top
X2 "24mhz" OSCILLATOR-3.2X2.5 1573,341 r270 top

## Footprints (in the part's own frame and the unit in brackets; to place one, negate y for a bottom-side part, rotate by r counter-clockwise, add the part's x,y. Pads: shape width x height; smd on the part's side, far side on the other; paste and mask are expansions set on the pad)
0402 [mil] "0402-RES"
  rect 20x24 smd: 1(-19.68,0) 2(20,0)
0402J [mil] "0402-RES"
  rect 20x20 smd: 1(40,0) 2(0,0) 3(-0.35,-41.34)
0603 [mil] "0603-RES"
  rect 44x40 smd: 1(-33.46,0) 2(34,0)
0805 [mil]
  rect 39.37x50 smd: 1(-40,0) 2(40,0)
  body extent -50,-30 50,30, height 31
0806 [mm]
  rect 1x1.65 smd: 1(-1.016,0) 2(1.016,0)
  body extent -1,-0.8 1,0.8, height 0.5
AD936X [mil]
  round 14 smd: A1(-173.23,173.23) A2(-141.73,173.23) A3(-110.24,173.23) A4(-78.74,173.23) A5(-47.24,173.23) A6(-15.75,173.23) A7(15.75,173.23) A8(47.24,173.23) A9(78.74,173.23) A10(110.24,173.23) A11(141.73,173.23) A12(173.23,173.23) B1(-173.23,141.73) B2(-141.73,141.73) B3(-110.24,141.73) B4(-78.74,141.73) B5(-47.24,141.73) B6(-15.75,141.73) B7(15.75,141.73) B8(47.24,141.73) B9(78.74,141.73) B10(110.24,141.73) B11(141.73,141.73) B12(173.23,141.73) C1(-173.23,110.24) C2(-141.73,110.24) C3(-110.24,110.24) C4(-78.74,110.24) C5(-47.24,110.24) C6(-15.75,110.24) C7(15.75,110.24) C8(47.24,110.24) C9(78.74,110.24) C10(110.24,110.24) C11(141.73,110.24) C12(173.23,110.24) D1(-173.23,78.74) D2(-141.73,78.74) D3(-110.24,78.74) D4(-78.74,78.74) D5(-47.24,78.74) D6(-15.75,78.74) D7(15.75,78.74) D8(47.24,78.74) D9(78.74,78.74) D10(110.24,78.74) D11(141.73,78.74) D12(173.23,78.74) E1(-173.23,47.24) E2(-141.73,47.24) E3(-110.24,47.24) E4(-78.74,47.24) E5(-47.24,47.24) E6(-15.75,47.24) E7(15.75,47.24) E8(47.24,47.24) E9(78.74,47.24) E10(110.24,47.24) E11(141.73,47.24) E12(173.23,47.24) F1(-173.23,15.75) F2(-141.73,15.75) F3(-110.24,15.75) F4(-78.74,15.75) F5(-47.24,15.75) F6(-15.75,15.75) F7(15.75,15.75) F8(47.24,15.75) F9(78.74,15.75) F10(110.24,15.75) F11(141.73,15.75) F12(173.23,15.75) G1(-173.23,-15.75) G2(-141.73,-15.75) G3(-110.24,-15.75) G4(-78.74,-15.75) G5(-47.24,-15.75) G6(-15.75,-15.75) G7(15.75,-15.75) G8(47.24,-15.75) G9(78.74,-15.75) G10(110.24,-15.75) G11(141.73,-15.75) G12(173.23,-15.75) H1(-173.23,-47.24) H2(-141.73,-47.24) H3(-110.24,-47.24) H4(-78.74,-47.24) H5(-47.24,-47.24) H6(-15.75,-47.24) H7(15.75,-47.24) H8(47.24,-47.24) H9(78.74,-47.24) H10(110.24,-47.24) H11(141.73,-47.24) H12(173.23,-47.24) J1(-173.23,-78.74) J2(-141.73,-78.74) J3(-110.24,-78.74) J4(-78.74,-78.74) J5(-47.24,-78.74) J6(-15.75,-78.74) J7(15.75,-78.74) J8(47.24,-78.74) J9(78.74,-78.74) J10(110.24,-78.74) J11(141.73,-78.74) J12(173.23,-78.74) K1(-173.23,-110.24) K2(-141.73,-110.24) K3(-110.24,-110.24) K4(-78.74,-110.24) K5(-47.24,-110.24) K6(-15.75,-110.24) K7(15.75,-110.24) K8(47.24,-110.24) K9(78.74,-110.24) K10(110.24,-110.24) K11(141.73,-110.24) K12(173.23,-110.24) L1(-173.23,-141.73) L2(-141.73,-141.73) L3(-110.24,-141.73) L4(-78.74,-141.73) L5(-47.24,-141.73) L6(-15.75,-141.73) L7(15.75,-141.73) L8(47.24,-141.73) L9(78.74,-141.73) L10(110.24,-141.73) L11(141.73,-141.73) L12(173.23,-141.73) M1(-173.23,-173.23) M2(-141.73,-173.23) M3(-110.24,-173.23) M4(-78.74,-173.23) M5(-47.24,-173.23) M6(-15.75,-173.23) M7(15.75,-173.23) M8(47.24,-173.23) M9(78.74,-173.23) M10(110.24,-173.23) M11(141.73,-173.23) M12(173.23,-173.23)
  silkscreen extent -197,-197 197,197
CSG324 [mm] "BGA, 324-Leads, Body 15x15mm, Pitch 0.8mm"
  round 0.36 smd: A1(-6.8,6.8) A2(-6,6.8) A3(-5.2,6.8) A4(-4.4,6.8) A5(-3.6,6.8) A6(-2.8,6.8) A7(-2,6.8) A8(-1.2,6.8) A9(-0.4,6.8) A10(0.4,6.8) A11(1.2,6.8) A12(2,6.8) A13(2.8,6.8) A14(3.6,6.8) A15(4.4,6.8) A16(5.2,6.8) A17(6,6.8) A18(6.8,6.8) B1(-6.8,6) B2(-6,6) B3(-5.2,6) B4(-4.4,6) B5(-3.6,6) B6(-2.8,6) B7(-2,6) B8(-1.2,6) B9(-0.4,6) B10(0.4,6) B11(1.2,6) B12(2,6) B13(2.8,6) B14(3.6,6) B15(4.4,6) B16(5.2,6) B17(6,6) B18(6.8,6) C1(-6.8,5.2) C2(-6,5.2) C3(-5.2,5.2) C4(-4.4,5.2) C5(-3.6,5.2) C6(-2.8,5.2) C7(-2,5.2) C8(-1.2,5.2) C9(-0.4,5.2) C10(0.4,5.2) C11(1.2,5.2) C12(2,5.2) C13(2.8,5.2) C14(3.6,5.2) C15(4.4,5.2) C16(5.2,5.2) C17(6,5.2) C18(6.8,5.2) D1(-6.8,4.4) D2(-6,4.4) D3(-5.2,4.4) D4(-4.4,4.4) D5(-3.6,4.4) D6(-2.8,4.4) D7(-2,4.4) D8(-1.2,4.4) D9(-0.4,4.4) D10(0.4,4.4) D11(1.2,4.4) D12(2,4.4) D13(2.8,4.4) D14(3.6,4.4) D15(4.4,4.4) D16(5.2,4.4) D17(6,4.4) D18(6.8,4.4) E1(-6.8,3.6) E2(-6,3.6) E3(-5.2,3.6) E4(-4.4,3.6) E5(-3.6,3.6) E6(-2.8,3.6) E7(-2,3.6) E8(-1.2,3.6) E9(-0.4,3.6) E10(0.4,3.6) E11(1.2,3.6) E12(2,3.6) E13(2.8,3.6) E14(3.6,3.6) E15(4.4,3.6) E16(5.2,3.6) E17(6,3.6) E18(6.8,3.6) F1(-6.8,2.8) F2(-6,2.8) F3(-5.2,2.8) F4(-4.4,2.8) F5(-3.6,2.8) F6(-2.8,2.8) F7(-2,2.8) F8(-1.2,2.8) F9(-0.4,2.8) F10(0.4,2.8) F11(1.2,2.8) F12(2,2.8) F13(2.8,2.8) F14(3.6,2.8) F15(4.4,2.8) F16(5.2,2.8) F17(6,2.8) F18(6.8,2.8) G1(-6.8,2) G2(-6,2) G3(-5.2,2) G4(-4.4,2) G5(-3.6,2) G6(-2.8,2) G7(-2,2) G8(-1.2,2) G9(-0.4,2) G10(0.4,2) G11(1.2,2) G12(2,2) G13(2.8,2) G14(3.6,2) G15(4.4,2) G16(5.2,2) G17(6,2) G18(6.8,2) H1(-6.8,1.2) H2(-6,1.2) H3(-5.2,1.2) H4(-4.4,1.2) H5(-3.6,1.2) H6(-2.8,1.2) H7(-2,1.2) H8(-1.2,1.2) H9(-0.4,1.2) H10(0.4,1.2) H11(1.2,1.2) H12(2,1.2) H13(2.8,1.2) H14(3.6,1.2) H15(4.4,1.2) H16(5.2,1.2) H17(6,1.2) H18(6.8,1.2) J1(-6.8,0.4) J2(-6,0.4) J3(-5.2,0.4) J4(-4.4,0.4) J5(-3.6,0.4) J6(-2.8,0.4) J7(-2,0.4) J8(-1.2,0.4) J9(-0.4,0.4) J10(0.4,0.4) J11(1.2,0.4) J12(2,0.4) J13(2.8,0.4) J14(3.6,0.4) J15(4.4,0.4) J16(5.2,0.4) J17(6,0.4) J18(6.8,0.4) K1(-6.8,-0.4) K2(-6,-0.4) K3(-5.2,-0.4) K4(-4.4,-0.4) K5(-3.6,-0.4) K6(-2.8,-0.4) K7(-2,-0.4) K8(-1.2,-0.4) K9(-0.4,-0.4) K10(0.4,-0.4) K11(1.2,-0.4) K12(2,-0.4) K13(2.8,-0.4) K14(3.6,-0.4) K15(4.4,-0.4) K16(5.2,-0.4) K17(6,-0.4) K18(6.8,-0.4) L1(-6.8,-1.2) L2(-6,-1.2) L3(-5.2,-1.2) L4(-4.4,-1.2) L5(-3.6,-1.2) L6(-2.8,-1.2) L7(-2,-1.2) L8(-1.2,-1.2) L9(-0.4,-1.2) L10(0.4,-1.2) L11(1.2,-1.2) L12(2,-1.2) L13(2.8,-1.2) L14(3.6,-1.2) L15(4.4,-1.2) L16(5.2,-1.2) L17(6,-1.2) L18(6.8,-1.2) M1(-6.8,-2) M2(-6,-2) M3(-5.2,-2) M4(-4.4,-2) M5(-3.6,-2) M6(-2.8,-2) M7(-2,-2) M8(-1.2,-2) M9(-0.4,-2) M10(0.4,-2) M11(1.2,-2) M12(2,-2) M13(2.8,-2) M14(3.6,-2) M15(4.4,-2) M16(5.2,-2) M17(6,-2) M18(6.8,-2) N1(-6.8,-2.8) N2(-6,-2.8) N3(-5.2,-2.8) N4(-4.4,-2.8) N5(-3.6,-2.8) N6(-2.8,-2.8) N7(-2,-2.8) N8(-1.2,-2.8) N9(-0.4,-2.8) N10(0.4,-2.8) N11(1.2,-2.8) N12(2,-2.8) N13(2.8,-2.8) N14(3.6,-2.8) N15(4.4,-2.8) N16(5.2,-2.8) N17(6,-2.8) N18(6.8,-2.8) P1(-6.8,-3.6) P2(-6,-3.6) P3(-5.2,-3.6) P4(-4.4,-3.6) P5(-3.6,-3.6) P6(-2.8,-3.6) P7(-2,-3.6) P8(-1.2,-3.6) P9(-0.4,-3.6) P10(0.4,-3.6) P11(1.2,-3.6) P12(2,-3.6) P13(2.8,-3.6) P14(3.6,-3.6) P15(4.4,-3.6) P16(5.2,-3.6) P17(6,-3.6) P18(6.8,-3.6) R1(-6.8,-4.4) R2(-6,-4.4) R3(-5.2,-4.4) R4(-4.4,-4.4) R5(-3.6,-4.4) R6(-2.8,-4.4) R7(-2,-4.4) R8(-1.2,-4.4) R9(-0.4,-4.4) R10(0.4,-4.4) R11(1.2,-4.4) R12(2,-4.4) R13(2.8,-4.4) R14(3.6,-4.4) R15(4.4,-4.4) R16(5.2,-4.4) R17(6,-4.4) R18(6.8,-4.4) T1(-6.8,-5.2) T2(-6,-5.2) T3(-5.2,-5.2) T4(-4.4,-5.2) T5(-3.6,-5.2) T6(-2.8,-5.2) T7(-2,-5.2) T8(-1.2,-5.2) T9(-0.4,-5.2) T10(0.4,-5.2) T11(1.2,-5.2) T12(2,-5.2) T13(2.8,-5.2) T14(3.6,-5.2) T15(4.4,-5.2) T16(5.2,-5.2) T17(6,-5.2) T18(6.8,-5.2) U1(-6.8,-6) U2(-6,-6) U3(-5.2,-6) U4(-4.4,-6) U5(-3.6,-6) U6(-2.8,-6) U7(-2,-6) U8(-1.2,-6) U9(-0.4,-6) U10(0.4,-6) U11(1.2,-6) U12(2,-6) U13(2.8,-6) U14(3.6,-6) U15(4.4,-6) U16(5.2,-6) U17(6,-6) U18(6.8,-6) V1(-6.8,-6.8) V2(-6,-6.8) V3(-5.2,-6.8) V4(-4.4,-6.8) V5(-3.6,-6.8) V6(-2.8,-6.8) V7(-2,-6.8) V8(-1.2,-6.8) V9(-0.4,-6.8) V10(0.4,-6.8) V11(1.2,-6.8) V12(2,-6.8) V13(2.8,-6.8) V14(3.6,-6.8) V15(4.4,-6.8) V16(5.2,-6.8) V17(6,-6.8) V18(6.8,-6.8)
  silkscreen extent -8.27,-7.5 7.5,7.5, body extent -7.5,-7.5 7.5,7.5, height 1.5
DFN-10P-3X3 [mm]
  rect 0.75x0.25 smd mask+0.064: 1(-1.451,0.999) 2(-1.451,0.499) 3(-1.451,-0.001) 4(-1.451,-0.501) 5(-1.451,-1.001) 6(1.4,-1.001) 7(1.4,-0.501) 8(1.4,-0.001) 9(1.4,0.499) 10(1.4,0.999)
  rect 1.64x2.6 smd: 11(-0.025,-0.001)
  silkscreen extent -1.96,-1.63 1.9,1.95
FPC-0.5mm-24 [mm]
  rect 2x3 smd: 0(-7.445,1.163) 0(7.445,1.163)
  rect 0.3x1.25 smd: 1(5.755,-1.163) 2(5.255,-1.163) 3(4.755,-1.163) 4(4.255,-1.163) 5(3.755,-1.163) 6(3.255,-1.163) 7(2.755,-1.163) 8(2.255,-1.163) 9(1.755,-1.163) 10(1.255,-1.163) 11(0.755,-1.163) 12(0.255,-1.163) 13(-0.245,-1.163) 14(-0.745,-1.163) 15(-1.245,-1.163) 16(-1.745,-1.163) 17(-2.245,-1.163) 18(-2.745,-1.163) 19(-3.245,-1.163) 20(-3.745,-1.163) 21(-4.245,-1.163) 22(-4.745,-1.163) 23(-5.245,-1.163) 24(-5.745,-1.163)
GH1.25-6 [mm]
  rect 1x2.8 smd: 0(-5.1,-1.5) 0(4.9,-1.5)
  rect 0.6x1.8 smd: 1(-3.125,1.45) 2(-1.875,1.45) 3(-0.625,1.45) 4(0.625,1.45) 5(1.875,1.45) 6(3.125,1.45)
  body extent -5.48,-3.1 5.27,1.75, height 4.25
HHM1711D1/HHM1732B1 [mm]
  rect 0.6x0.3 smd: 1(-0.45,0.55) 2(-0.45,0) 3(-0.45,-0.55) 4(0.45,-0.55) 5(0.45,0) 6(0.45,0.55)
  silkscreen extent -1.32,-1 1.1,1
L3015 [mm]
  rect 1x3 smd: 1(0,0) 2(2,0)
MICRO-YZX [mm]
  rect 0.4x1.5 smd: 1(-1.3,5.85) 5(1.3,5.85)
  rect 0.3x1.5 smd: 2(-0.65,5.85) 3(0,5.85) 4(0.65,5.85)
  oval 1x1.7 hole 0.8 slot 1.2 at 90 deg: 5(-3.625,2.82) 5(3.625,2.82)
  oval 1.1x1.2 hole 0.7: 5(-2.425,5.5) 5(2.425,5.5)
  rect 4x2 smd: 5(0,2.95)
  silkscreen extent -3.4,4.05 3.4,5.25
OSCILLATOR-3.2X2.5 [mil] "OSCILLATOR-3.2X2.5"
  rect 56x48 smd: 1(-43.31,-33.46) 2(44,-33.46) 3(44,34) 4(-43.31,34)
  silkscreen extent -95,-83 83,71
SMA-2 [mm]
  rect 0.75x1.5 smd: 1(2.5,1.2)
  rect 2x4 smd: GND(0,0) GND(5,0)
  Top Layer pour cut-out: 1,2 4,2 4,-2 1,-2
SO8 [mm]
  rect 1x0.559 smd: 1(-3,1.905) 2(-3,0.635) 3(-3,-0.635) 4(-3,-1.905) 5(3,-1.905) 6(3,-0.635) 7(3,0.635) 8(3,1.905)
  silkscreen extent -1.37,-2.5 1.37,2.5, body extent -3,-2.45 3,2.45, height 1.63
SOT23-5 [mil] "SOT23-5"
  rect 22x48 smd: 1(-37.4,-51.19) 2(0,-51.19) 3(38,-51.19) 4(38,52) 5(-37.4,52)
  silkscreen extent -56,-17 56,32
STM-UFBGA176+25_M [mm] "BGA, 201-Balls, Body 10x10mm, Pitch 0.65mm"
  round 0.3 smd: A1(-4.55,4.55) A2(-3.9,4.55) A3(-3.25,4.55) A4(-2.6,4.55) A5(-1.95,4.55) A6(-1.3,4.55) A7(-0.65,4.55) A8(0,4.55) A9(0.65,4.55) A10(1.3,4.55) A11(1.95,4.55) A12(2.6,4.55) A13(3.25,4.55) A14(3.9,4.55) A15(4.55,4.55) B1(-4.55,3.9) B2(-3.9,3.9) B3(-3.25,3.9) B4(-2.6,3.9) B5(-1.95,3.9) B6(-1.3,3.9) B7(-0.65,3.9) B8(0,3.9) B9(0.65,3.9) B10(1.3,3.9) B11(1.95,3.9) B12(2.6,3.9) B13(3.25,3.9) B14(3.9,3.9) B15(4.55,3.9) C1(-4.55,3.25) C2(-3.9,3.25) C3(-3.25,3.25) C4(-2.6,3.25) C5(-1.95,3.25) C6(-1.3,3.25) C7(-0.65,3.25) C8(0,3.25) C9(0.65,3.25) C10(1.3,3.25) C11(1.95,3.25) C12(2.6,3.25) C13(3.25,3.25) C14(3.9,3.25) C15(4.55,3.25) D1(-4.55,2.6) D2(-3.9,2.6) D3(-3.25,2.6) D4(-2.6,2.6) D5(-1.95,2.6) D6(-1.3,2.6) D7(-0.65,2.6) D8(0,2.6) D9(0.65,2.6) D10(1.3,2.6) D11(1.95,2.6) D12(2.6,2.6) D13(3.25,2.6) D14(3.9,2.6) D15(4.55,2.6) E1(-4.55,1.95) E2(-3.9,1.95) E3(-3.25,1.95) E4(-2.6,1.95) E12(2.6,1.95) E13(3.25,1.95) E14(3.9,1.95) E15(4.55,1.95) F1(-4.55,1.3) F2(-3.9,1.3) F3(-3.25,1.3) F4(-2.6,1.3) F6(-1.3,1.3) F7(-0.65,1.3) F8(0,1.3) F9(0.65,1.3) F10(1.3,1.3) F12(2.6,1.3) F13(3.25,1.3) F14(3.9,1.3) F15(4.55,1.3) G1(-4.55,0.65) G2(-3.9,0.65) G3(-3.25,0.65) G4(-2.6,0.65) G6(-1.3,0.65) G7(-0.65,0.65) G8(0,0.65) G9(0.65,0.65) G10(1.3,0.65) G12(2.6,0.65) G13(3.25,0.65) G14(3.9,0.65) G15(4.55,0.65) H1(-4.55,0) H2(-3.9,0) H3(-3.25,0) H4(-2.6,0) H6(-1.3,0) H7(-0.65,0) H8(0,0) H9(0.65,0) H10(1.3,0) H12(2.6,0) H13(3.25,0) H14(3.9,0) H15(4.55,0) J1(-4.55,-0.65) J2(-3.9,-0.65) J3(-3.25,-0.65) J4(-2.6,-0.65) J6(-1.3,-0.65) J7(-0.65,-0.65) J8(0,-0.65) J9(0.65,-0.65) J10(1.3,-0.65) J12(2.6,-0.65) J13(3.25,-0.65) J14(3.9,-0.65) J15(4.55,-0.65) K1(-4.55,-1.3) K2(-3.9,-1.3) K3(-3.25,-1.3) K4(-2.6,-1.3) K6(-1.3,-1.3) K7(-0.65,-1.3) K8(0,-1.3) K9(0.65,-1.3) K10(1.3,-1.3) K12(2.6,-1.3) K13(3.25,-1.3) K14(3.9,-1.3) K15(4.55,-1.3) L1(-4.55,-1.95) L2(-3.9,-1.95) L3(-3.25,-1.95) L4(-2.6,-1.95) L12(2.6,-1.95) L13(3.25,-1.95) L14(3.9,-1.95) L15(4.55,-1.95) M1(-4.55,-2.6) M2(-3.9,-2.6) M3(-3.25,-2.6) M4(-2.6,-2.6) M5(-1.95,-2.6) M6(-1.3,-2.6) M7(-0.65,-2.6) M8(0,-2.6) M9(0.65,-2.6) M10(1.3,-2.6) M11(1.95,-2.6) M12(2.6,-2.6) M13(3.25,-2.6) M14(3.9,-2.6) M15(4.55,-2.6) N1(-4.55,-3.25) N2(-3.9,-3.25) N3(-3.25,-3.25) N4(-2.6,-3.25) N5(-1.95,-3.25) N6(-1.3,-3.25) N7(-0.65,-3.25) N8(0,-3.25) N9(0.65,-3.25) N10(1.3,-3.25) N11(1.95,-3.25) N12(2.6,-3.25) N13(3.25,-3.25) N14(3.9,-3.25) N15(4.55,-3.25) P1(-4.55,-3.9) P2(-3.9,-3.9) P3(-3.25,-3.9) P4(-2.6,-3.9) P5(-1.95,-3.9) P6(-1.3,-3.9) P7(-0.65,-3.9) P8(0,-3.9) P9(0.65,-3.9) P10(1.3,-3.9) P11(1.95,-3.9) P12(2.6,-3.9) P13(3.25,-3.9) P14(3.9,-3.9) P15(4.55,-3.9) R1(-4.55,-4.55) R2(-3.9,-4.55) R3(-3.25,-4.55) R4(-2.6,-4.55) R5(-1.95,-4.55) R6(-1.3,-4.55) R7(-0.65,-4.55) R8(0,-4.55) R9(0.65,-4.55) R10(1.3,-4.55) R11(1.95,-4.55) R12(2.6,-4.55) R13(3.25,-4.55) R14(3.9,-4.55) R15(4.55,-4.55)
  silkscreen extent -5.55,-5 5,5.32, body extent -5,-5 5,5, height 0.6
"TestPad - 1mm" [mm]
  round 1 smd: 1(0,0)
TPS7A8101 [mm]
  rect 1.5x2.8 smd: 0(0,0)
  rect 0.6x0.3 smd: 1(-1.5,0.975) 2(-1.5,0.325) 3(-1.5,-0.325) 4(-1.5,-0.975) 5(1.5,-0.975) 6(1.5,-0.325) 7(1.5,0.325) 8(1.5,0.975)
  silkscreen extent -1.6,-1.6 1.6,1.6, body extent -1.5,-1.5 1.5,1.5, height 0.6
TPS62130 [mm]
  rect 1.7x1.7 smd: 0(0,0)
  rect 0.6x0.25 smd: 1(-1.5,0.75) 2(-1.5,0.25) 3(-1.5,-0.25) 4(-1.5,-0.75) 9(1.5,-0.75) 10(1.5,-0.25) 11(1.5,0.25) 12(1.5,0.75)
  rect 0.25x0.6 smd: 5(-0.75,-1.5) 6(-0.25,-1.5) 7(0.25,-1.5) 8(0.75,-1.5) 13(0.75,1.5) 14(0.25,1.5) 15(-0.25,1.5) 16(-0.75,1.5)
  silkscreen extent -1.5,-1.5 1.5,1.5, body extent -1.5,-1.5 1.5,1.5, height 0.6
TXC_7Q [mm]
  rect 1x0.9 smd: 1(-1.275,-0.9) 2(1.275,-0.9) 3(1.275,0.9) 4(-1.275,0.9)
  silkscreen extent -2.53,-1.6 1.78,1.35
USB3300 [mm]
  round 0.75 hole 0.4: 0(-1,1) 0(-1,-1) 0(1,1) 0(1,-1)
  rect 0.8x0.25 smd: 1(-2.6,1.75) 2(-2.6,1.25) 3(-2.6,0.75) 4(-2.6,0.25) 5(-2.6,-0.25) 6(-2.6,-0.75) 7(-2.6,-1.25) 8(-2.6,-1.75) 17(2.6,-1.75) 18(2.6,-1.25) 19(2.6,-0.75) 20(2.6,-0.25) 21(2.6,0.25) 22(2.6,0.75) 23(2.6,1.25) 24(2.6,1.75)
  rect 0.25x0.8 smd: 9(-1.75,-2.6) 10(-1.25,-2.6) 11(-0.75,-2.6) 12(-0.25,-2.6) 13(0.25,-2.6) 14(0.75,-2.6) 15(1.25,-2.6) 16(1.75,-2.6) 25(1.75,2.6) 26(1.25,2.6) 27(0.75,2.6) 28(0.25,2.6) 29(-0.25,2.6) 30(-0.75,2.6) 31(-1.25,2.6) 32(-1.75,2.6)
  silkscreen extent -2.5,-2.5 2.5,2.5, body extent -2.5,-2.5 2.5,2.5, height 0.85

## Part data
C1 C2 C20 C26: library part CAP/0402
C3 C7 C9 C32 C33 C34 C43 C44 C45 C46 C47 C48 C49 C50 C51 C52 C53 C54 C55 C56 C57 C58 C59 C60 C61 C62 C63 C64 C65 C66 C67 C71 C76 C79 C81 C87 C88 C89 C90 C91 C92 C94 C95 C96 C97 C98 C99 C100 C101 C102 C103: library part Cap, "Capacitor"
C4 C5 C6 C8 C10 C11 C12 C13 C14 C15 C16 C17 C18 C19 C21 C22 C23 C24 C25 C27 C28 C31 C35 C36 C37 C38 C68 C69 C70 C72 C73 C74 C75 C77 C78 C80 C82 C83 C84 C85 C86 C93 C108 C109 C110 C111 C112 C113: library part CAP0402-CAP, "<b>Capacitor</b> / Standard 0603 ceramic capacitor, and 0.1\" leaded capacitor."
C29 C30 C39 C40 C41 C42: "Capacitor"
J1 J2 J3: library part SW-SPDT, "SPDT Subminiature Toggle Switch, Right Angle Mounting, Vertical Actuation"
L1 L2 L3 L4: library part L/2.5*2.0
L13: library part Inductor, "Inductor"
LED1: "Typical INFRARED GaAs LED"
P2: "Connector SMD USB Micro Type B middle mount"
R1 R2 R3 R4 R5 R6 R7 R8 R9 R10 R11 R12 R13 R14 R15 R16 R17 R18 R19 R20 R21 R22 R23 R24 R25 R26 R27 R28 R29 R30 R31 R32 R33 R34 R35 R38 R39 R40 R41 R42 R43 R44 R45 R46 R47 R48 R49 R50 R51 R52 R53 R54 R55 R56 R57 R60 R61 R62 R64: library part Res2, "Resistor"
U2: "Spartan-6 LX 1.2V FPGA, 218 User I/Os, 324-Ball Chip-Scale BGA (0.8mm Pitch), Speed Grade 3, Industrial Grade, Pb-Free"
U4: "Imported"
U7 U12: library part LP5907
U11: "ARM Cortex-M4 32-bit MCU+FPU, 210 DMIPS, 1024 kB Flash, 256 kB Internal RAM, 140 I/Os, 176-pin UFBGA, -40 to 85 degC, Tray"
USB2: library part USB_Micro_TypeB, "Connector SMD USB Micro Type B middle mount"
X2: library part OSCILLATOR-3.2X2.5, "Crystal Oscillator in 3.2x2.5 SMD"

## Via types
v1: diameter 11.81, hole 7.87, Top Layer to Bottom Layer, 680 vias
v2: diameter 20, hole 12, Top Layer to Bottom Layer, 104 vias
v3: diameter 19.68, hole 11.81, Top Layer to Bottom Layer, 20 vias
v4: diameter 12, hole 8, Top Layer to Bottom Layer, 1 vias

## Nets (pads, with @x,y where several pads share a name; then routed paths per layer and width w, separated by ;. In a path a pad name is that pad's centre, name@x,y a point inside that pad or via, vN(x,y) a via of type N, cw(c..) or ccw(c..) an arc to the next point about the centre after c; other vN are vias at no path point)
1.2: C3.2 C90.1 C91.1 C98.1 C99.1 C100.1 C101.1 L1.2 R5.1 R32.2 U2.G7 U2.H9 U2.H11 U2.J8 U2.J10 U2.K9 U2.K11 U2.L8 U2.L10 U2.M7 U2.M12 U5.4 | length 1994.3
  Top Layer w6: R5.1@380.31,452.69 v1(414,419)
  Top Layer w8: U5.4@353.06,507.04 353.06,490.94 362,482 371,482 380.31,472.69 R5.1@380.31,454 ; v1(911.51,944.51) U2.G7@927.26,960.26 ; v1(943.01,1007.5) U2.H9@958.76,1023.25 ; v1(943.01,1101.99) U2.H11@958.76,1086.24 v1(974.5,1070.5) U2.J10@990.25,1054.75 ; v1(974.5,976.01) U2.J8@990.25,991.76 ; U2.K9@1021.75,1023.25 v1(1037.5,1007.5) ; U2.K11@1021.75,1086.24 v1(1037.5,1101.99) ; U2.L8@1053.24,991.76 v1(1068.99,976.01) ; U2.L10@1053.24,1054.75 v1(1068.99,1070.5) ; U2.M7@1084.74,960.26 v1(1100.49,944.51) ; U2.M12@1084.74,1117.74 v1(1100.49,1133.49)
  Top Layer w15: L1.2@380,759 L1.2@383,756 ; C3.2@435,624 435,704 L1.2@383,756 ; v2(526,756) L1.2@383,756
  Signal Layer 1 w8: v1(911.51,944.51) 927,960 ; v1(943.01,1101.99) v1(974.5,1070.5) ; v1(1100.49,1133.49) 1085,1118 ; v1(1257,944) 1243,930 1115,930 v1(1100.49,944.51) v1(1068.99,976.01) v1(1037.5,1007.5) ; 927,960 958.5,960 v1(974.5,976.01) 1006,976.01 v1(1037.5,1007.5) ; 927,960 927,991.5 v1(943.01,1007.5) 943.01,1039 v1(974.5,1070.5) ; v1(974.5,1070.5) 1006,1101.99 v1(1037.5,1101.99) 1053.5,1118 1085,1118 ; v1(1037.5,1007.5) 1068.99,1039 v1(1068.99,1070.5) 1085,1086.5 1085,1118
  Bottom Layer w6: v1(414,419) 414,525 438,549 438,578 526,666 v2(526,756)
  Bottom Layer w8: v1(1257,944) 1302,944 R32.2@1312,934
  other v2: 531,701 531,729 498,760
1.8D: C31.1 C32.2 C48.1 C55.1 C76.1 C79.1 C81.1 C87.1 L4.2 R12.1 R40.2 R44.1 U2.B5 U2.B10 U2.B15 U2.D7 U2.D13 U2.E10 U2.E17 U2.G15 U2.J14 U2.J17 U2.M15 U2.R17 U4.H12 | length 3042.2
  Top Layer w4: v1(817.02,944.51) U2.D7@832.77,960.26 ; v1(817.02,1164.98) U2.D13@832.77,1149.24 ; v1(911.51,1227.98) U2.G15@927.26,1212.23 ; v1(974.5,1196.48) U2.J14@990.25,1180.73 ; U2.M15@1084.74,1212.23 v1(1100.49,1227.98)
  Top Layer w6: U4.H12@832.76,1605.77 832.76,1583.76 v1(832,1583) 832,1533 v1@842,1523
  Top Layer w8: v1(754,1197) 754.55,1197 U2.B15@769.78,1212.23 ; v1(754.51,883.49) 754.51,882 U2.B5@769.78,897.27 ; U2.B10@769.78,1054.75 v1(786.37,1038.16) ; v1@847.86,1038.34 U2.E10@864.27,1054.75 ; v1(848,1324) 848,1291.49 U2.E17@864.27,1275.22 ; U2.J17@990.25,1275.22 1006.47,1259 v1(1007,1259) ; U2.R17@1179.23,1275.22 v1(1195,1291)
  Top Layer w10: R12.1@386.32,265 C31.1@386.32,300 386.32,346.32 C32.2@474,434 474,459 481,466 481,526 L4.2@529,574
  Top Layer w20: L4.2@529,574 555,600 555,792 ; v2(531,816) 555,792 ; v2(556,814) 556,809 555,808 555,792
  Signal Layer 1 w8: v2(671.09,870.68) v2@671.41,871 ; v1(817.02,1164.98) 833.04,1181 888,1181 896,1189 896,1212.46 v1(911.51,1227.98)
  Bottom Layer w6: v1@846,1326 v1(846,1524)
  Bottom Layer w8: v2(556,814) 557,814 612.61,869.61 626.49,883.49 v1(754.51,883.49) 769.02,898 792,898 801,907 801,928.49 v1(817.02,944.51) 833,960.49 833,1023 v1@848.16,1038.16 ; v1(754,1197) 770,1181 801.01,1181 v1(817.02,1164.98) 833,1149.01 833,1067 848.52,1051.48 v1(848.52,1038.52) v1@848.16,1038.16 ; v1(786.37,1038.16) v1@848.16,1038.16 ; v1(848,1324) 897,1275 991,1275 v1(1007,1259) 1023,1275 1179,1275 ; v1(911.51,1227.98) 927.49,1212 958.98,1212 v1(974.5,1196.48) 1005.48,1196.48 1021,1212 1084.51,1212 v1(1100.49,1227.98) 1115.51,1243 1170,1243 1179,1252 1179,1275 ; R44.1@1399.08,1373.92 1316.16,1291 v1(1195,1291) 1179,1275
  other v1: 785.53,1164.98 911.51,1196.48
  other v2: 693,859
2.2A: C29.2 C30.2 R8.1 R20.1 R21.2 R27.2 T14.1 | length 764.1
  Top Layer w10: v1(317,883) 318,883 R8.1@349,852
  Top Layer w15: 75,1281 108,1248 T14.1@227,1248 ; T14.1@229,1246 C30.2@229,1161 234.54,1155.46 v1(265,1155.46) R20.1@314,1155.46 360.54,1202 C29.2@382,1202
  Bottom Layer w10: v1(265,1155.46) 265,936 317,884 v1(317,883)
2.8: C45.2 R15.2 R17.1 T16.1 U7.5 | length 498.4
  Top Layer w8: T16.1@1311,623 1335.4,598.6 U7.5@1445,598.6 ; v1(1362,832) R15.2@1372,842
  Bottom Layer w8: v1(1365,612) 1367,614 R17.1@1367,951.32